# Altium PCB PCB1.PcbDoc (part 1 of 4)
Units mil, origin at the board's own origin, x right, y up, seen from the top; angles counter-clockwise.
Board outline 6796.85 x 4400 mil, 4 copper layers (Top Layer, Layer 1, Layer 2, Bottom Layer), stack 23.756 mil thick; 175 components, 152 nets, 720 pads, 183 vias.
Unrouted connection lines stored in the file: 10.
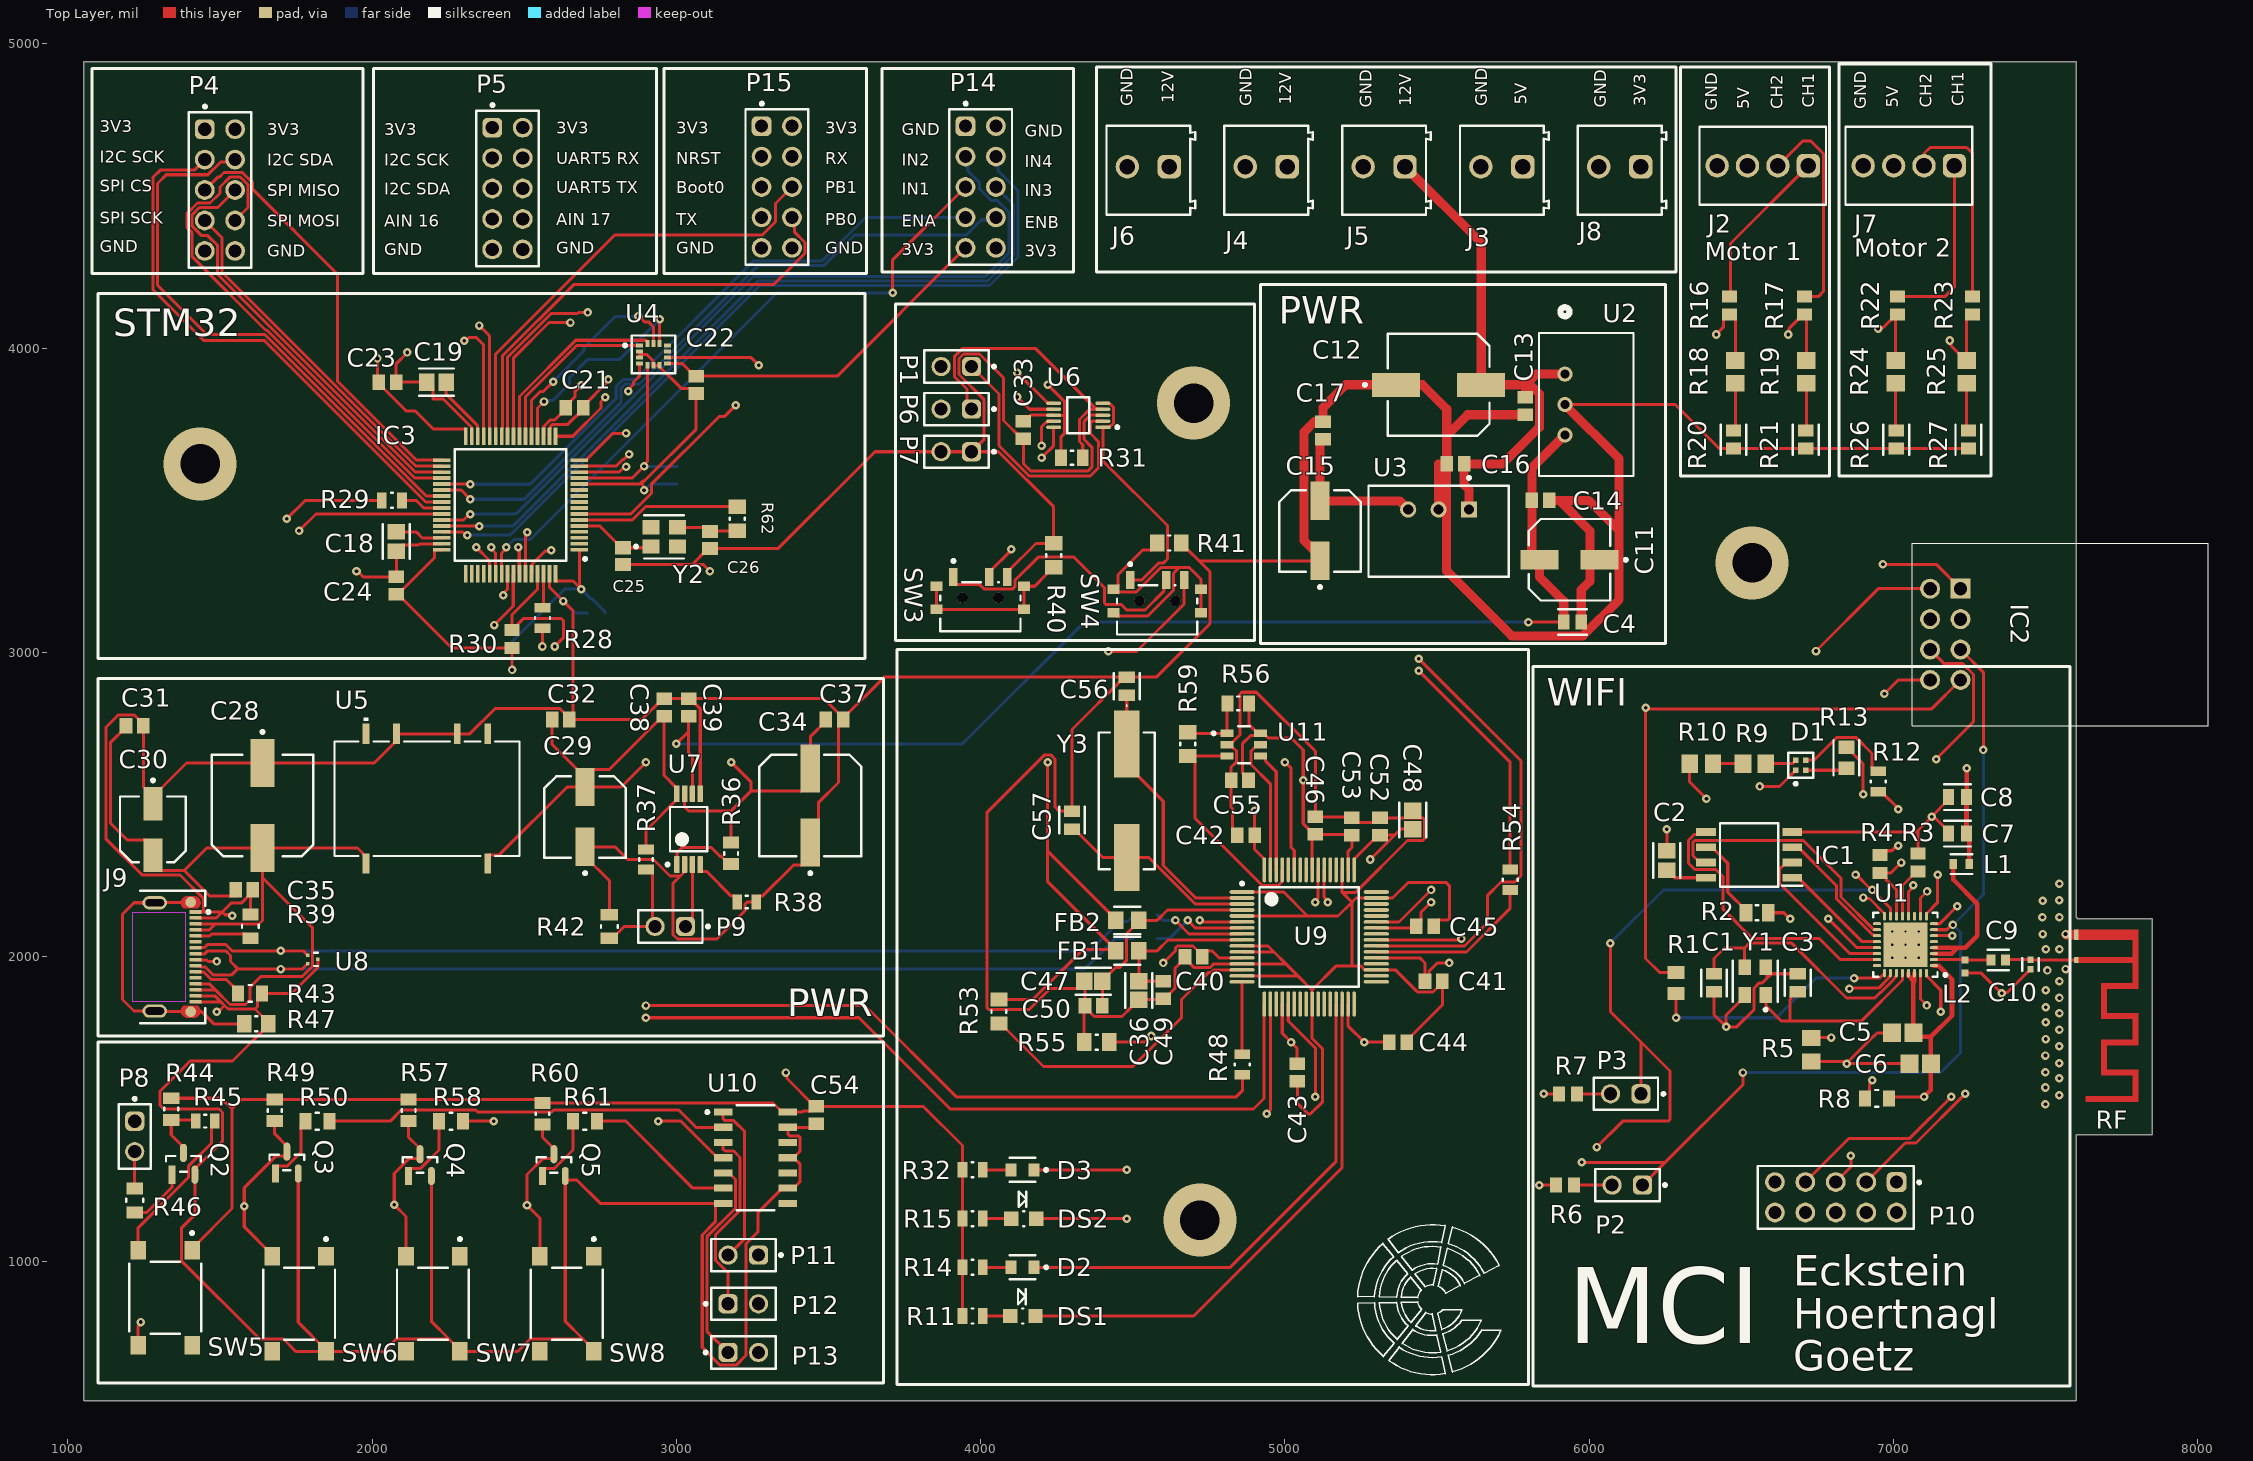
[diagram p0: Top Layer view]
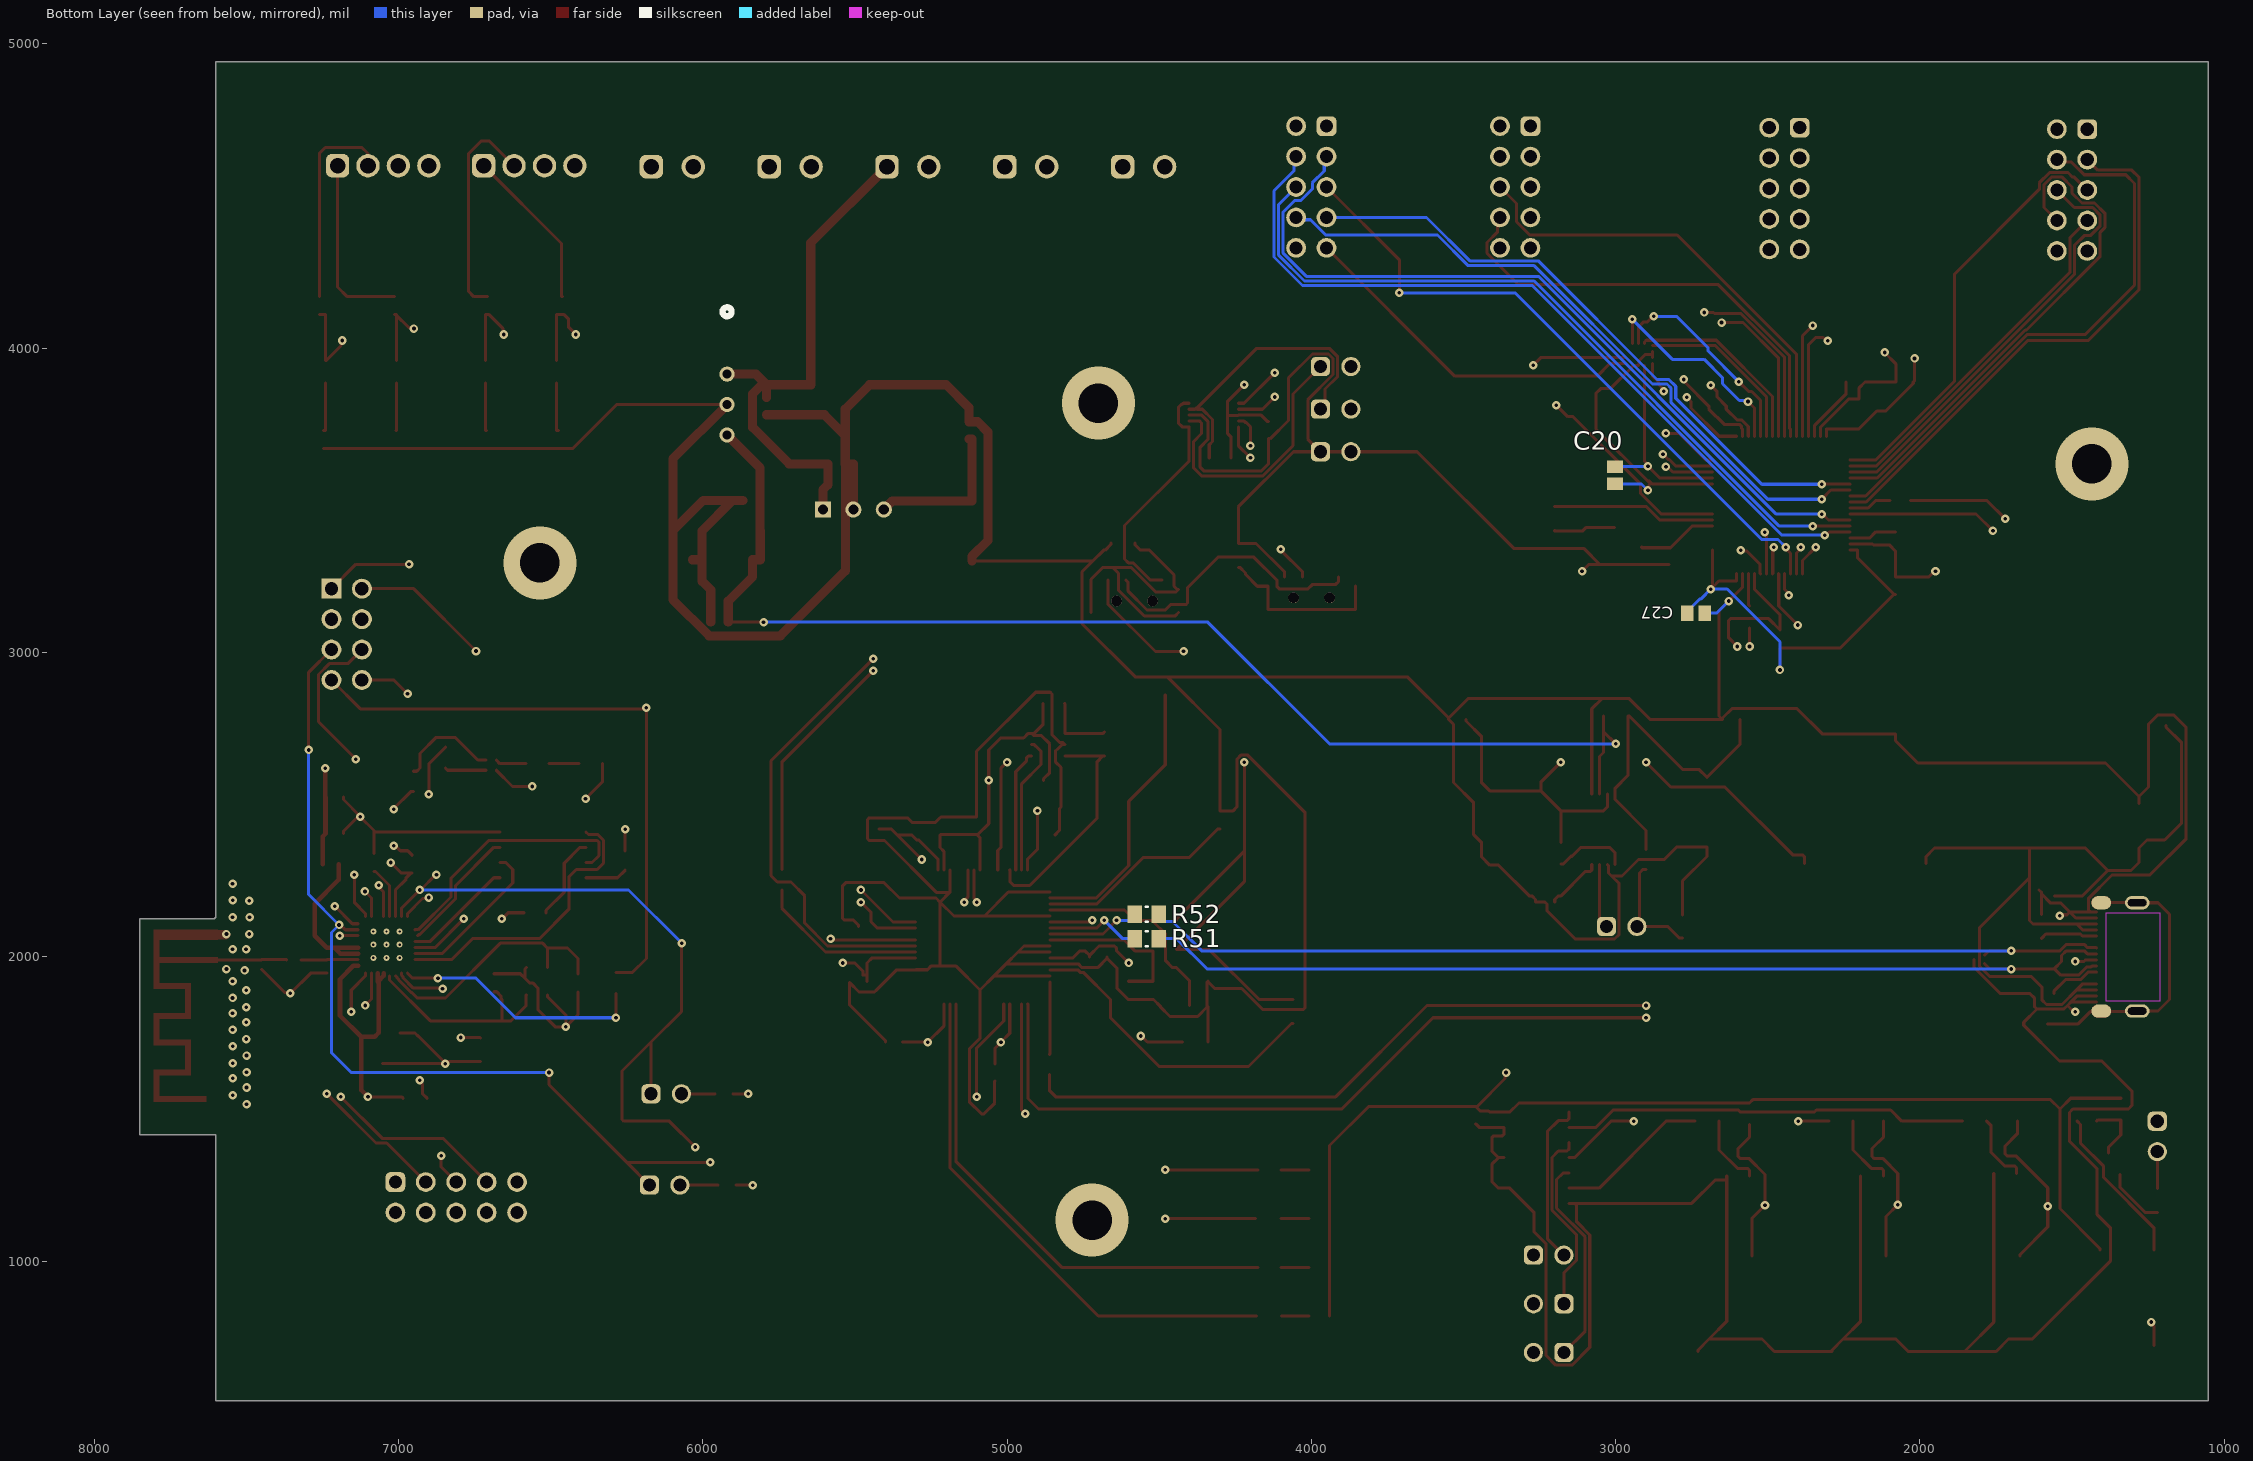
[diagram p1: Bottom Layer view, seen from below]
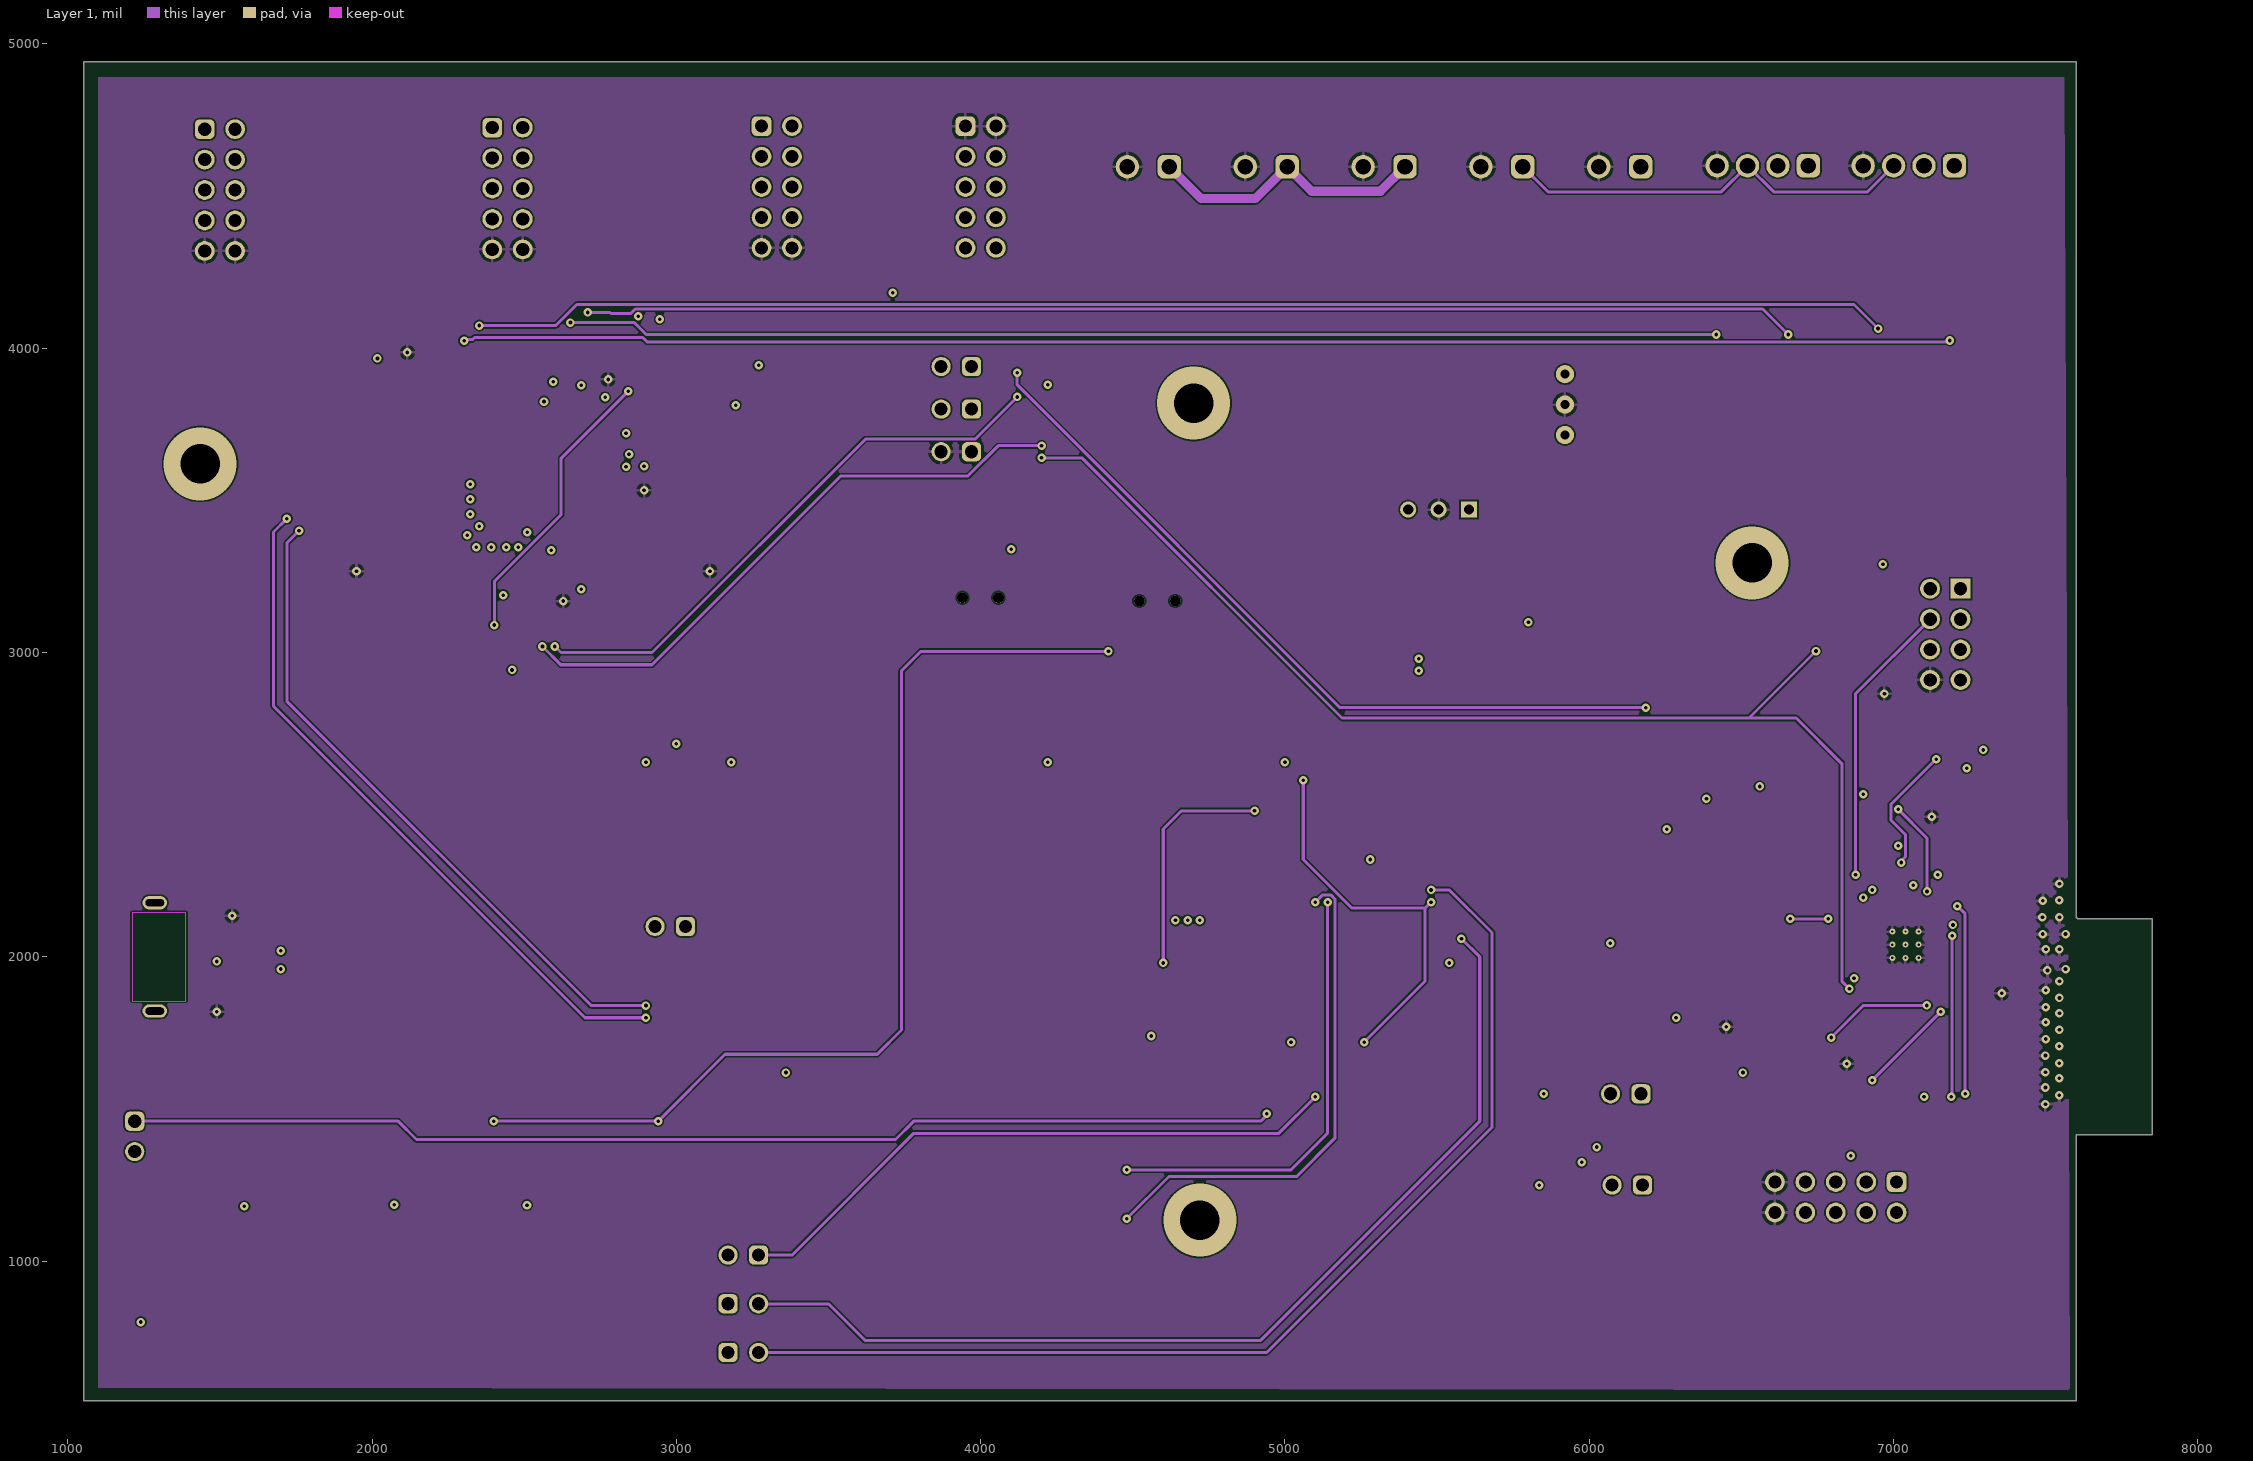
[diagram p2: Layer 1]
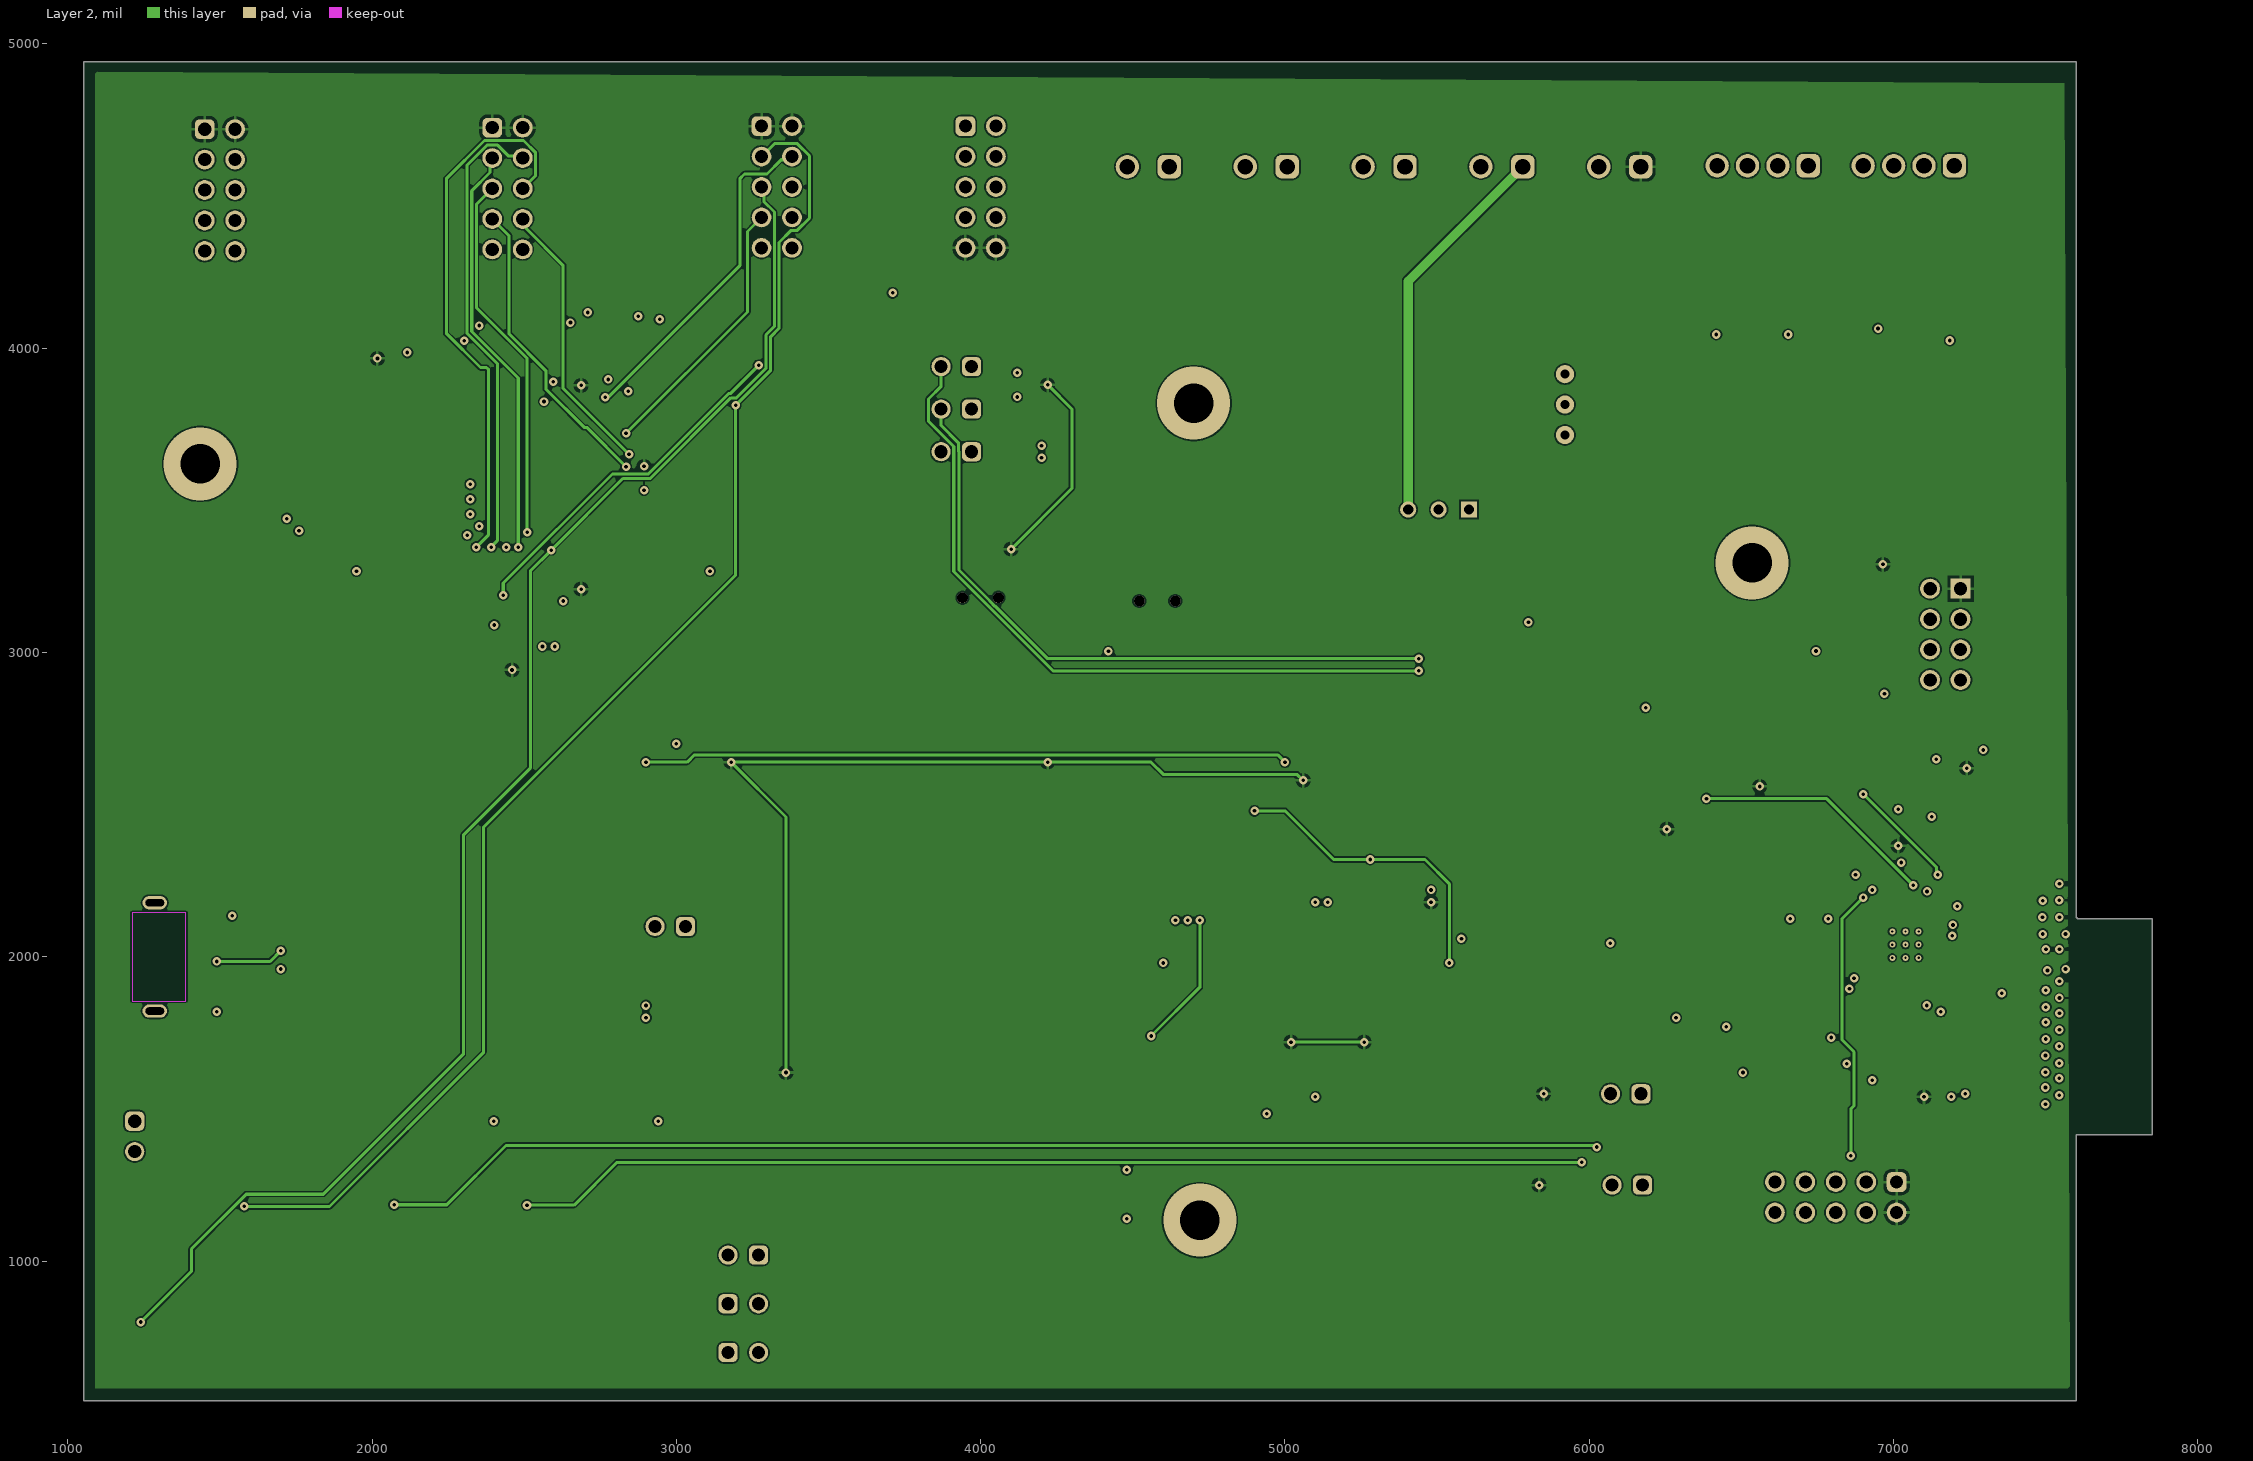
[diagram p3: Layer 2]
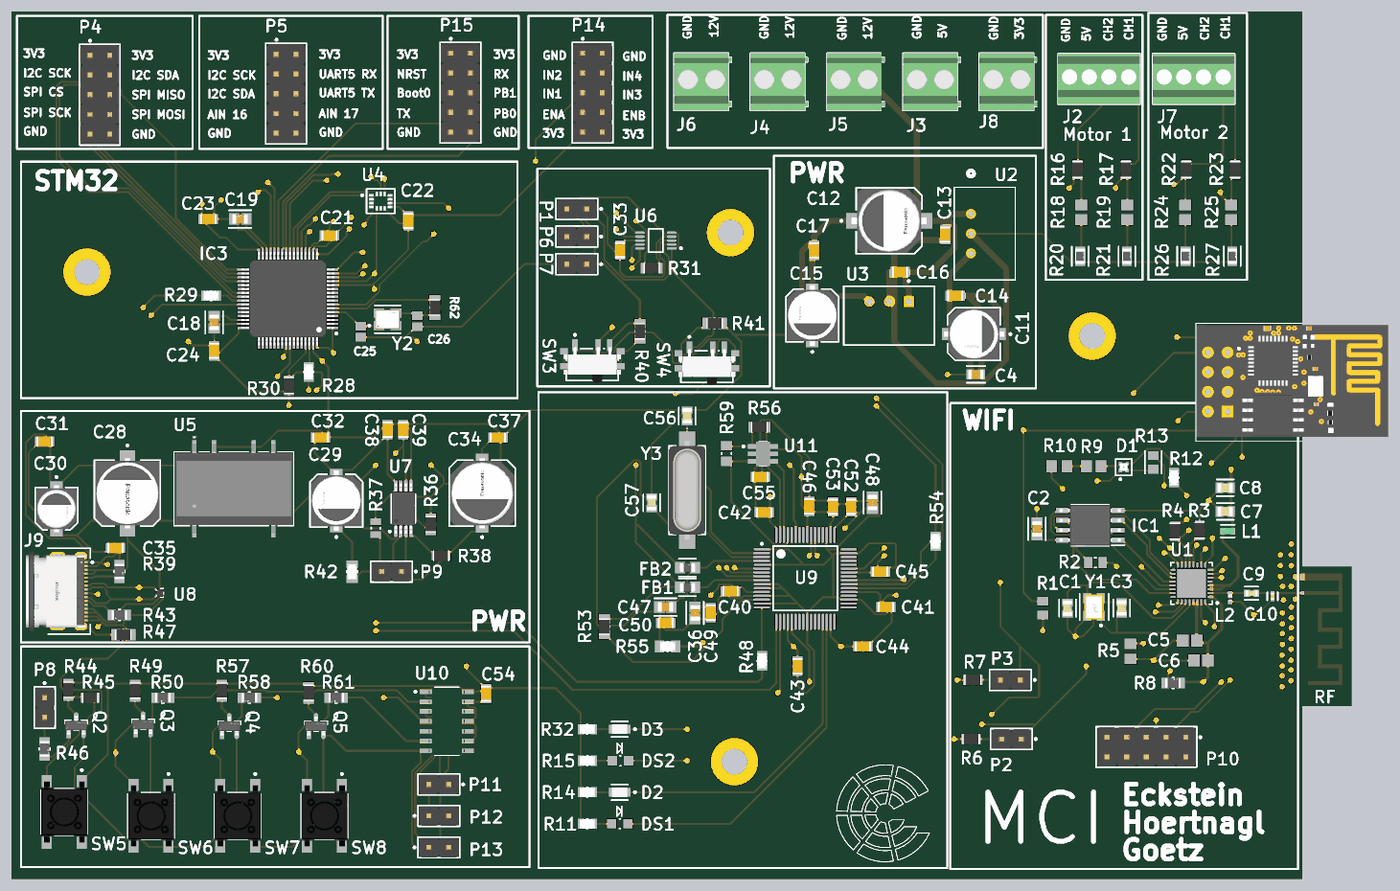
[diagram p6: 3D render of the assembled board from above, using the file's embedded part models]
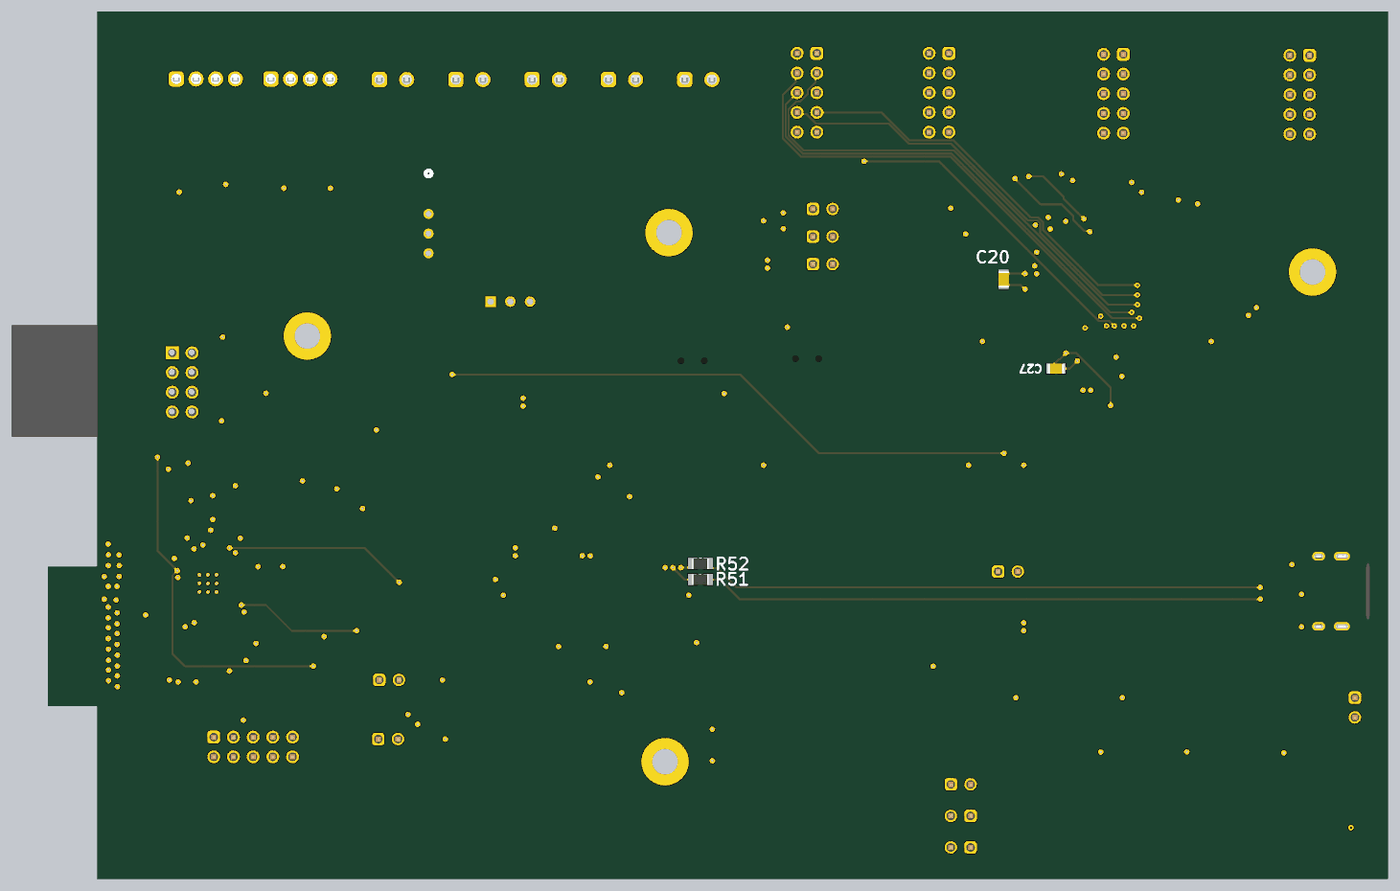
[diagram p7: 3D render of the assembled board from below, using the file's embedded part models]

## Layer stack, top to bottom
Top Solder: solder mask 0.4, Solder Resist, Dk 3.5
Top Layer: signal copper 1.4
Dielectric 2: prepreg 2.8, PP-006, Dk 4.1
Layer 1: signal copper 1.378
Dielectric 1: dielectric 12.6, FR-4, Dk 4.8
Layer 2: signal copper 1.378
Dielectric 3: prepreg 2.8, PP-006, Dk 4.1
Bottom Layer: signal copper 1.4
Bottom Solder: solder mask 0.4, Solder Resist, Dk 3.5

## Board outline
7600,2130 7605,2125 7850,2125 7850,1415 7600,1415 7600,540.94 1053.15,540.94 1053.15,4940.94 7600,4940.94

## Design rules (kind name [scope] priority, off if disabled: settings)
Clearance [All] p1: gap=5 ignorepadtopadclearanceinfootprint=TRUE
HoleSize [All] p1: absolutevalues=TRUE maxlimit=300 minlimit=1 maxpercent=80.000 minpercent=20.000
MinimumSolderMaskSliver [All] p1: minsoldermaskwidth=5
PolygonConnect [All] p1: connectstyle=Relief reliefconductorwidth=10 reliefentries=4 polygonreliefangle="90 Angle" airgapwidth=10
RoutingVias [All] p1: holewidth=12 width=28 viastyle="Through Hole" minholewidth=12 minwidth=28 maxholewidth=12 maxwidth=28
SilkToSilkClearance [All] p1: silktosilkclearance=5
SilkToSolderMaskClearance [IsPad] p1: minsilkscreentomaskgap=5 clearancetoexposedcopper=TRUE
SolderMaskExpansion [All] p1: expansion=4 istentingtop=FALSE
SupplyNets "Schematic Supply Nets_7" [InNet('5VBUS')] p1: voltage=0.000
SupplyNets "Schematic Supply Nets_6" [InNet('+12V')] p2: voltage=0.000
SupplyNets "Schematic Supply Nets_5" [InNet('VCORE')] p3: voltage=0.000
SupplyNets "Schematic Supply Nets_4" [InNet('3V3BUS')] p4: voltage=0.000
SupplyNets "Schematic Supply Nets_3" [InNet('+5V')] p5: voltage=0.000
SupplyNets "Schematic Supply Nets_2" [InNet('+3V3')] p6: voltage=0.000
SupplyNets "Schematic Supply Nets_1" [InNet('3V3AKKU')] p7: voltage=0.000
SupplyNets "Schematic Supply Nets" [InNet('GND')] p8: voltage=0.000
Width [All] p1: maxlimit=30 minlimit=10 preferedwidth=10 minimp=50.000000 maximp=50.000000 favimp=50.000000
26 further rules are at their usual default settings.

## Classes and differential pairs
component class stm32_schematic: C4 C11 C12 C13 C14 C15 C16 C17 C18 C19 C20 C21 C22 C23 C24 C25 C26 C27 IC3 J2 J3 J4 J5 J6 J7 J8 P4 P5 P14 P15 R16 R17 R18 R19 R20 R21 R22 R23 R24 R25 R26 R27 R28 R29 R30 R62 U2 U3 U4 Y2
component class PCB_USB_UART: C28 C29 C30 C31 C32 C33 C34 C35 C36 C37 C38 C39 C40 C41 C42 C43 C44 C45 C46 C47 C48 C49 C50 C51 C52 C53 C54 C55 C56 C57 D2 D3 DS1 DS2 FB1 FB2 P1 P6 P7 P8 P9 P11 P12 P13 Q2 Q3 Q4 Q5 R11 R14 R15 R31 R32 R36 R37 R38 R39 R40 R41 R42 R43 R44 R45 R46 R47 R48 R49 R50 R51 R52 R53 R54 R55 R56 R57 R58 R59 R60 R61 SW3 SW4 SW5 SW6 SW7 SW8 U5 U6 U7 U8 U9 U10 U11 Y3
component class ESP8266_final: *1 C1 C2 C3 C5 C6 C7 C8 C9 C10 D1 IC1 IC2 J1 L1 L2 P2 P3 P10 Q1 R1 R2 R3 R4 R5 R6 R7 R8 R9 R10 R12 R13 RF U1 Y1

## Components (designator, comment, footprint, x,y, rotation, side; value= is the part's Value field where it differs from the comment)
C1 "C0805C100J5GACTU" FP-C0805C-DN-MFG 6410,1914.53 r270 top value="10 pF"
C2 "08051C104KAT2A" FP-0805-L_2_01_0_2-W_1_25-IPC_B 6255,2316.72 r270 top
C3 "C0805C100J5GACTU" FP-C0805C-DN-MFG 6685,1915 r270 top value="10 pF"
C4 "GRM21BR61C106KE15L" FP-GRM21B-0_1-IPC_C 5944.88,3100.39 r0 top
C5 "C0805C105K5RACTU" CAPC2013X140X50ML20T25 7030,1750 r0 top
C6 "C0805C105K5RACTU" CAPC2013X140X50ML20T25 7087,1649 r0 top
C7 "C0805C106K8PACTU" FP-C0805C-DG-MFG 7210,2405 r180 top value=10uF
C8 "C0805C104J8RACTU" FP-C0805C-DN-MFG 7210,2525 r180 top value="0.10 μF"
C9 "C0603C829C5GACTU" FP-C0603C-CF-MFG 7343.62,1990 r180 top value="8.2 pF"
C10 "CBR04C249B5GAC" FP-CBR04C-MFG 7450,1975 r90 top value="2.4 pF"
C11 "EEEFT1H470AP" FP-FTD-MFG 5935,3305 r180 top
C12 "EEEFT1H221AP" FP-FTF-MFG 5504.76,3880 r0 top
C13 "Capacitor 100 nF +/-10% 50 V 0805" CAPC2013X95X50LL10T25 5790,3810 r90 top value=100nF
C14 "Capacitor 100 nF +/-10% 50 V 0805" CAPC2013X95X50LL10T25 5840,3500 r180 top value=100nF
C15 "EEEFT1H470AP" FP-FTD-MFG 5115,3400 r90 top
C16 "Capacitor 100 nF +/-10% 50 V 0805" CAPC2013X95X50LL10T25 5560,3620 r0 top value=100nF
C17 "Capacitor 100 nF +/-10% 50 V 0805" CAPC2013X95X50LL10T25 5125,3730 r270 top value=100nF
C18 "0805ZD225KAT2A" FP-0805-L_2_01_0_2-W_1_25-IPC_B 2080,3365 r270 top
C19 "0805ZD225KAT2A" FP-0805-L_2_01_0_2-W_1_25-IPC_B 2211.89,3889.06 r180 top
C20 "Capacitor 100 nF +/-10% 50 V 0805" CAPC2013X95X50LL10T25 3001.97,3582.68 r90 bottom value=100nF
C21 "Capacitor 100 nF +/-10% 50 V 0805" CAPC2013X95X50LL10T25 2665,3805 r180 top value=100nF
C22 "Capacitor 100 nF +/-10% 50 V 0805" CAPC2013X95X50LL10T25 3065,3880 r90 top value=100nF
C23 "Capacitor 100 nF +/-10% 50 V 0805" CAPC2013X95X50LL10T25 2050.43,3889.06 r180 top value=100nF
C24 "Capacitor 100 nF +/-10% 50 V 0805" CAPC2013X95X50LL10T25 2080,3220 r270 top value=100nF
C25 "08055A150JAT2A" CAPC2013X140X50LL20T25 2824.8,3316.93 r90 top
C26 "08055A150JAT2A" CAPC2013X140X50LL20T25 3110,3370 r90 top
C27 "Capacitor 100 nF +/-10% 50 V 0805" CAPC2013X95X50LL10T25 2736.22,3129.92 r0 bottom value=100nF
C28 "EEEFK1H101P" FP-FKF-MFG 1640,2497.4 r270 top
C29 "EEEFT1H470AP" FP-FTD-MFG 2700,2460 r90 top
C30 "EEE-FK1H100UR" FP-FKC-MFG 1280,2418.66 r270 top
C31 "Capacitor 100 nF +/-10% 50 V 0805" CAPC2013X95X50LL10T25 1220,2760 r180 top value=100nF
C32 "Capacitor 100 nF +/-10% 50 V 0805" CAPC2013X95X50LL10T25 2620,2780 r180 top value=100nF
C33 "Capacitor 100 nF +/-10% 50 V 0805" CAPC2013X95X50LL10T25 4140,3731.46 r90 top value=100nF
C34 "EEE-FC1H220P" FP-FCE-MFG 3440,2497.4 r90 top
C35 "Capacitor 100 nF +/-10% 50 V 0805" CAPC2013X95X50LL10T25 1580,2220 r180 top value=100nF
C36 "C2012X5R1H475K125AB" FP-C2012-125-0_2-IPC_B 4520,1889.92 r270 top
C37 "Capacitor 100 nF +/-10% 50 V 0805" CAPC2013X95X50LL10T25 3520,2780 r180 top value=100nF
C38 "Capacitor 100 nF +/-10% 50 V 0805" CAPC2013X95X50LL10T25 2960,2820 r270 top value=100nF
C39 "Capacitor 100 nF +/-10% 50 V 0805" CAPC2013X95X50LL10T25 3040,2820 r270 top value=100nF
C40 "Capacitor 100 nF +/-10% 50 V 0805" CAPC2013X95X50LL10T25 4700,2000 r0 top value=100nF
C41 "Capacitor 100 nF +/-10% 50 V 0805" CAPC2013X95X50LL10T25 5488.54,1920 r180 top value=100nF
C42 "Capacitor 100 nF +/-10% 50 V 0805" CAPC2013X95X50LL10T25 4871.46,2400 r0 top value=100nF
C43 "Capacitor 100 nF +/-10% 50 V 0805" CAPC2013X95X50LL10T25 5040,1620 r90 top value=100nF
C44 "Capacitor 100 nF +/-10% 50 V 0805" CAPC2013X95X50LL10T25 5371.46,1720 r180 top value=100nF
C45 "Capacitor 100 nF +/-10% 50 V 0805" CAPC2013X95X50LL10T25 5460,2100 r180 top value=100nF
C46 "Capacitor 100 nF +/-10% 50 V 0805" CAPC2013X95X50LL10T25 5100,2431.46 r270 top value=100nF
C47 "C2012X5R1H475K125AB" FP-C2012-125-0_2-IPC_B 4369.92,1920 r180 top
C48 "C2012X5R1H475K125AB" FP-C2012-125-0_2-IPC_B 5420,2449.92 r90 top
C49 "Capacitor 100 nF +/-10% 50 V 0805" CAPC2013X95X50LL10T25 4600,1891.46 r90 top value=100nF
C50 "Capacitor 100 nF +/-10% 50 V 0805" CAPC2013X95X50LL10T25 4371.46,1840 r0 top value=100nF
C52 "Capacitor 100 nF +/-10% 50 V 0805" CAPC2013X95X50LL10T25 5312.36,2428.54 r270 top value=100nF
C53 "Capacitor 100 nF +/-10% 50 V 0805" CAPC2013X95X50LL10T25 5220,2428.54 r270 top value=100nF
C54 "Capacitor 100 nF +/-10% 50 V 0805" CAPC2013X95X50LL10T25 3460,1480 r90 top value=100nF
C55 "Capacitor 100 nF +/-10% 50 V 0805" CAPC2013X95X50LL10T25 4851.46,2580 r0 top value=100nF
C56 "C0805C270J5GACTU" FP-C0805C-DN-MFG 4480,2889.53 r90 top value="27 pF"
C57 "C0805C270J5GACTU" FP-C0805C-DN-MFG 4300,2449.53 r90 top value="27 pF"
D1 "SML-LX0404SIUPGUSB" FP-SML-LX0404SIUPGUSB-MFG 6695,2630 r90 top
D2 "SML-LXT0805IW-TR" FP-SML-LXT0805IW-TR-MFG 4137.4,980 r180 top
D3 "SML-LXT0805IW-TR" FP-SML-LXT0805IW-TR-MFG 4137.4,1300 r180 top
DS1 "SML-LXT0805GW-TR" LUMX-SML-LXT0805_V 4138.66,820 r0 top
DS2 "SML-LXT0805GW-TR" LUMX-SML-LXT0805_V 4141.34,1140 r0 top
FB1 "HZ0805E601R-10" FP-HZ0805-MFG 4481.71,2020 r0 top
FB2 "HZ0805E601R-10" FP-HZ0805-MFG 4481.71,2120 r0 top
IC1 "W25Q128JVSQ" SOIC127P790X216-8N 6525,2335 r180 top
IC2 "ESP-01" ESP01 7220,3210 r270 top
IC3 "STM32H7A3RIT6" QFP50P1200X1200X160-64N 2455,3485 r180 top
J2 "691210910004" 691210910004 6570,4600 r180 top
J3 "691214110002" 691214110002 5712.78,4585 r180 top
J4 "691214110002" 691214110002 4938.33,4585 r180 top
J5 "691214110002" 691214110002 5325.55,4585 r180 top
J6 "691214110002" 691214110002 4551.1,4585 r180 top
J7 "691210910004" 691210910004 7050,4600 r180 top
J8 "691214110002" 691214110002 6100,4585 r180 top
J9 "213083-0005" FP-2130830005-MFG 1280,2000 r270 top
L1 "LQW18AN4N3C00D" FP-LQW18AN_00-MFG 7222.8,2305 r180 top
L2 "7447840015G" WE-MK_0402_L1W0.5H0.5 7235,1968.35 r90 top
P1 "61300211121" 61300211121 3920,3940 r180 top
P2 "61300211121" 61300211121 6125,1249.98 r180 top
P3 "61300211121" 61300211121 6120,1550 r180 top
P4 "61301021121" 61301021121 1500,4520 r270 top
P5 "61301021121" 61301021121 2445,4525 r270 top
P6 "61300211121" 61300211121 3920,3800 r180 top
P7 "61300211121" 61300211121 3920,3660 r180 top
P8 "61300211121" 61300211121 1220,1410 r270 top
P9 "61300211121" 61300211121 2980,2100 r180 top
P10 "61301021121" 61301021121 6810,1210 r180 top
P11 "61300211121" 61300211121 3220,1020 r180 top
P12 "61300211121" 61300211121 3220,860 r0 top
P13 "61300211121" 61300211121 3220,700 r0 top
P14 "61301021121" 61301021121 4000,4530 r270 top
P15 "61301021121" 61301021121 3330,4530 r270 top
Q2 "BSS138" FP-318-08-IPC_B 1380,1320 r90 top
Q3 "BSS138" FP-318-08-IPC_B 1720,1324.17 r90 top
Q4 "BSS138" FP-318-08-IPC_B 2157.4,1315.83 r90 top
Q5 "BSS138" FP-318-08-IPC_B 2597.4,1315.83 r90 top
R1 "TNPW0805499RBEEN" RESC2013X55X40NL15T20 6285,1914.45 r270 top
R2 "CRCW0805200RFKEA" RESC2013X50X30NL20T20 6551.42,2145 r0 top
R3 "ERA-6AEB103V" RESC2013X60X40LL20T25_A 7080,2310 r270 top
R4 "ERA-6AEB103V" RESC2013X60X40LL20T25_A 6955,2304.53 r90 top
R5 "ERJ6ENF1202V" RESC2013X70X40ML20T20 6730,1695 r90 top
R6 "ERA-6AEB103V" RESC2013X60X40LL20T25_A 5920.47,1250 r180 top
R7 "ERA-6AEB103V" RESC2013X60X40LL20T25_A 5930,1550 r180 top
R8 "RN73C2A12KBTG" FP-RN732A-MFG 6945,1535 r0 top value=12KΩ
R9 "ERA6AEB101V" RESC2013X60X40ML20T25 6542.6,2635 r180 top
R10 "ERJ-6ENF24R9V" RESC2013X70X40ML20T20 6368.39,2635 r180 top
R11 "CRCW080568R0FKEA" FP-CRCW0805-e3-IPC_C 3973.5,820 r180 top
R12 "CRCW080522R0FKEA" FP-CRCW0805-e3-IPC_C 6950,2576.5 r270 top
R13 "ERJ-6ENF4990V" FP-ERJ6EN-IPC_B 6845,2654.47 r90 top
R14 "CRCW080568R0FKEA" FP-CRCW0805-e3-IPC_C 3973.5,980 r180 top
R15 "CRCW080568R0FKEA" FP-CRCW0805-e3-IPC_C 3973.5,1140 r180 top
R16 "ERA-6AEB103V" RESC2013X60X40LL20T25_A 6460.31,4140 r90 top
R17 "ERA-6AEB103V" RESC2013X60X40LL20T25_A 6706.77,4140 r90 top
R18 "ERA6AEB472V" RESC2013X60X40ML20T25 6480,3922.6 r90 top
R19 "ERA6AEB472V" RESC2013X60X40ML20T25 6713.33,3922.6 r90 top
R20 "ERA6AEB102V" FP-ERA6A-IPC_C 6474.09,3700 r90 top
R21 "ERA6AEB102V" FP-ERA6A-IPC_C 6711.36,3700 r90 top
R22 "ERA-6AEB103V" RESC2013X60X40LL20T25_A 7013.23,4140 r90 top
R23 "ERA-6AEB103V" RESC2013X60X40LL20T25_A 7259.68,4140 r90 top
R24 "ERA6AEB472V" RESC2013X60X40ML20T25 7006.67,3922.6 r90 top
R25 "ERA6AEB472V" RESC2013X60X40ML20T25 7240,3922.6 r90 top
R26 "ERA6AEB102V" FP-ERA6A-IPC_C 7008.64,3700 r90 top
R27 "ERA6AEB102V" FP-ERA6A-IPC_C 7245.91,3700 r90 top
R28 "CRCW080568R0FKEA" FP-CRCW0805-e3-IPC_C 2560,3113.5 r270 top
R29 "CRCW080568R0FKEA" FP-CRCW0805-e3-IPC_C 2065,3500 r180 top
R30 "ERA-6AEB103V" RESC2013X60X40LL20T25_A 2460,3045 r270 top
R31 "RC0805FR-0710KL" RESC2013X60X35NL10T20 4300,3640 r180 top
R32 "CRCW080568R0FKEA" FP-CRCW0805-e3-IPC_C 3973.5,1300 r180 top
R36 "RC0805FR-0710KL" RESC2013X60X35NL10T20 3180,2340 r270 top
R37 "CRCW08054K30FKEA" RESC2013X50X30LL20T20 2900,2320 r90 top
R38 "RC0805FR-07470RL" RESC2013X60X35LL10T20 3231.5,2180 r180 top
R39 "RN73C2A5K11BTDF" FP-RN732A-MFG 1600,2100.63 r270 top value=5.11KΩ
R40 "RC0805JR-070RL" RESC2013X60X35ML10T20 4240,3319.37 r270 top
R41 "RC0805JR-070RL" RESC2013X60X35ML10T20 4619.37,3360 r180 top
R42 "CRCW08051K50FKEA" FP-CRCW0805-e3-MFG 2780,2100 r270 top
R43 "RN73C2A5K11BTDF" FP-RN732A-MFG 1599.37,1880 r180 top value=5.11KΩ
R44 "RC0805FR-0710KL" RESC2013X60X35NL10T20 1340,1500 r90 top
R45 "RC0805FR-07470RL" RESC2013X60X35LL10T20 1451.5,1460 r0 top
R46 "RN73C2A100RBTDF" FP-RN732A-MFG 1220,1200 r270 top value=100Ω
R47 "RC0805JR-070RL" RESC2013X60X35ML10T20 1619.37,1780 r0 top
R48 "CRCW080568R0FKEA" FP-CRCW0805-e3-IPC_C 4860,1646.5 r270 top
R49 "RC0805FR-0710KL" RESC2013X60X35NL10T20 1680,1495.43 r90 top
R50 "RN73C2A100RBTDF" FP-RN732A-MFG 1820,1460 r180 top value=100Ω
R51 "RC0805FR-0710RL" RESC2013X60X35ML10T20 4540.63,2060 r0 bottom
R52 "RC0805FR-0710RL" RESC2013X60X35ML10T20 4540.63,2140 r0 bottom
R53 "RC0805FR-071KL" RESC2013X60X35ML10T20 4060,1820.63 r270 top
R54 "CRCW080568R0FKEA" FP-CRCW0805-e3-IPC_C 5740,2253.5 r90 top
R55 "CRCW080512K0FKEA" FP-CRCW0805-e3-IPC_A 4381.37,1720 r0 top
R56 "RC0805FR-0710KL" RESC2013X60X35NL10T20 4846.68,2833.06 r0 top
R57 "RC0805FR-0710KL" RESC2013X60X35NL10T20 2120,1495.43 r90 top
R58 "RN73C2A100RBTDF" FP-RN732A-MFG 2259.37,1460 r180 top value=100Ω
R59 "RC0805JR-072KL" RESC2013X60X35ML10T20 4680,2699.37 r270 top
R60 "RC0805FR-0710KL" RESC2013X60X35NL10T20 2560,1484.57 r90 top
R61 "RN73C2A100RBTDF" FP-RN732A-MFG 2699.37,1460 r180 top value=100Ω
R62 "Resistor 0R +/- 5% 0805 125 mW" RESC2013X60X35ML10T20 3200,3440 r90 top value=0
RF "RF_ESP8266" PCBComponent_1 7605.48,2072.61 r270 top
SW3 "PCM12SMTR" FP-PCM12SMTR-MFG 3999.06,3150.47 r0 top
SW4 "PCM12SMTR" FP-PCM12SMTR-MFG 4580,3140 r0 top
SW5 "PTS645SM43SMTR92LFS" FP-PTS645SM43SMTR92LFS-MFG 1320,880 r270 top
SW6 "PTS645SM43SMTR92LFS" FP-PTS645SM43SMTR92LFS-MFG 1760,860 r270 top
SW7 "PTS645SM43SMTR92LFS" FP-PTS645SM43SMTR92LFS-MFG 2200,860 r270 top
SW8 "PTS645SM43SMTR92LFS" FP-PTS645SM43SMTR92LFS-MFG 2640,860 r270 top
U1 "ESP8266EX" ESFS-QFN-32_L 7039,2040 r180 top
U2 "TSR 1-2433" TSR1-SINGLE_TRP 5920,3915 r270 top
U3 "TSR 1-2450" TRACO-SIP-3_V 5505,3470 r180 top
U4 "LSM6DSOXTR" FP-LGA-14L-DM00249496-MFG 2925,3980 r0 top
U5 "TSRN 1-2433SM" TSR(N 2180,2520 r90 top
U6 "TS5A23157DGSR" FP-DGS0010A-IPC_C 4320.74,3780 r180 top
U7 "TPS2113APW" PW0008A_N 3040,2419.65 r90 top
U8 "TPD2EUSB30DRTR" DRT0003A 1804.84,1991.7 r0 top
U9 "FT2232HL-Reel" LQFP-64_M 5079.61,2065.59 r0 top
U10 "SN74LVC14AD" FP-D0014A-MFG 3260,1340 r0 top
U11 "93LC56BT-I/OT" FP-C04-028-MFG 4864.88,2697.4 r0 top
Y1 "ABM8-26.000MHZ-10-1-U-T" FP-ABM8-MFG 6545,1920 r90 top
Y2 "ABM8AIG-24.000MHZ-12-2Z-T3" FP-ABM8AIG-MFG 2960,3380 r0 top
Y3 "ABLS2-12.000MHZ-B4Y-T" ABLS 4480,2512.99 r270 top

## Footprints (in the part's own frame and the unit in brackets; to place one, negate y for a bottom-side part, rotate by r counter-clockwise, add the part's x,y. Pads: shape width x height; smd on the part's side, far side on the other; paste and mask are expansions set on the pad)
61300211121 [mm] "Pin Header, pitch 2.54 mm, THT, Vertical, single row, 2p"
  rrect50% 1.6x1.6 hole 1.1: 1(-1.27,0)
  round 1.6 hole 1.1: 2(1.27,0)
  silkscreen extent -3.26,-1.34 2.69,1.34, body extent -2.54,-1.27 2.54,1.27, height 8.57
61301021121 [mm] "Pin Header, pitch 2.54 mm, THT, Vertical, dual row, 10p"
  rrect50% 1.65x1.65 hole 1.1: 1(-5.08,-1.27)
  round 1.65 hole 1.1: 2(-5.08,1.27) 3(-2.54,-1.27) 4(-2.54,1.27) 5(0,-1.27) 6(0,1.27) 7(2.54,-1.27) 8(2.54,1.27) 9(5.08,-1.27) 10(5.08,1.27)
  silkscreen extent -7.08,-2.61 6.5,2.61, body extent -6.35,-2.54 6.35,2.54, height 8.59
691210910004 [mm] "2,54mm - modular - green - Horizontal wire entry - Cage clamp - 0,8mm2 wires - 04p"
  rrect50% 1.95x1.95 hole 1.3: 1(-3.81,0)
  round 1.95 hole 1.3: 2(-1.27,0) 3(1.27,0) 4(3.81,0)
  silkscreen extent -5.28,-3.25 5.28,3.25, body extent -5.28,-3.25 5.28,3.25, height 8.55
691214110002 [mm] "3.50 mm Horizontal Entry Modular, 2p"
  rrect50% 1.95x1.95 hole 1.3: 1(-1.75,-0.3)
  round 1.95 hole 1.3: 2(1.75,-0.3)
  silkscreen extent -3.9,-3.7 3.5,3.7, body extent -3.95,-3.7 3.5,3.7, height 8.55
ABLS [mm]
  rect 5.6x2.1 smd: 1(-4.75,0) 2(4.75,0)
  silkscreen extent -8,-2.35 5.7,2.35, body extent -6.35,-2.35 6.35,2.35, height 4.2
CAPC2013X95X50LL10T25 [mm] "Chip Capacitor, 2-Leads, Body 2.10x1.35mm, IPC High Density"
  rect 1.05x1.3 smd: 1(-0.725,0) 2(0.725,0)
  body extent -1.05,-0.67 1.05,0.67, height 0.95
CAPC2013X140X50LL20T25 [mm] "Chip Capacitor, 2-Leads, Body 2.00x1.25mm, IPC High Density"
  rect 1.1x1.35 smd: 1(-0.7,0) 2(0.7,0)
  body extent -1.1,-0.72 1.1,0.72, height 1.4
CAPC2013X140X50ML20T25 [mm] "Chip Capacitor, 2-Leads, Body 2.00x1.25mm, IPC Low Density"
  rect 1.5x1.55 smd: 1(-0.9,0) 2(0.9,0)
  body extent -1.1,-0.72 1.1,0.72, height 1.4
DRT0003A [mm] "SOTFL, 3-Leads, Body 1x1mm (inc leads), Pitch 0.35mm"
  rrect33% 0.3x0.3 smd: 1(-0.425,0.35) 2(-0.425,-0.35) 3(0.425,0)
  silkscreen extent 0.13,-0.55 0.42,0.55, body extent -0.5,-0.5 0.5,0.5, height 0.5
ESFS-QFN-32_L [mm] "QFN, 32-Leads, Body 5.05x5.05mm, Pitch 0.50mm, Thermal Pad 3.70x3.70mm, IPC High Density"
  oval 0.7x0.25 smd: 1(-2.375,1.75) 2(-2.375,1.25) 3(-2.375,0.75) 4(-2.375,0.25) 5(-2.375,-0.25) 6(-2.375,-0.75) 7(-2.375,-1.25) 8(-2.375,-1.75) 17(2.375,-1.75) 18(2.375,-1.25) 19(2.375,-0.75) 20(2.375,-0.25) 21(2.375,0.25) 22(2.375,0.75) 23(2.375,1.25) 24(2.375,1.75)
  oval 0.25x0.7 smd: 9(-1.75,-2.375) 10(-1.25,-2.375) 11(-0.75,-2.375) 12(-0.25,-2.375) 13(0.25,-2.375) 14(0.75,-2.375) 15(1.25,-2.375) 16(1.75,-2.375) 25(1.75,2.375) 26(1.25,2.375) 27(0.75,2.375) 28(0.25,2.375) 29(-0.25,2.375) 30(-0.75,2.375) 31(-1.25,2.375) 32(-1.75,2.375)
  rect 3.7x3.7 smd: 33(0,0)
  silkscreen extent -3.45,-2.67 2.68,2.68, body extent -2.52,-2.52 2.53,2.53, height 0.9
ESP01 [mm]
  rect 1.665x1.665 hole 1.11: 1(0,0)
  round 1.665 hole 1.11: 2(2.54,0) 3(5.08,0) 4(7.62,0) 5(0,-2.54) 6(2.54,-2.54) 7(5.08,-2.54) 8(7.62,-2.54)
  silkscreen extent -3.81,-4.04 11.43,20.66, body extent -3.56,-3.98 10.84,20.72, height 2.75
FP-318-08-IPC_B [mm]
  rect 1.524x0.578 smd paste+0 mask+0: 1(-0.91,0.95)
  rrect100% 1.524x0.578 smd paste+0 mask+0: 2(-0.91,-0.95) 3(0.91,0)
  silkscreen extent -0.65,-1.45 0.65,1.45, body extent -1.92,-1.7 1.92,1.7, height 0.25
FP-0805-L_2_01_0_2-W_1_25-IPC_B [mil]
  rect 51.36x57.33 smd paste+0 mask+0: 1(-31.72,0) 2(31.72,0)
  silkscreen extent -57,-44 57,44, body extent -67,-39 67,39, height 10
FP-2130830005-MFG [mm]
  round 0.9 smd paste-1000 mask+0: 1(-4.57,3.15) 2(4.57,3.15)
  rrect100% 1.1x1.65 smd far side paste-1000 mask+0: 1(-4.52,3.15) 2(4.52,3.15)
  rrect100% 1.1x2.05 hole 1.55 slot 0.6 at 0 deg paste-2539.97 mask+0: 3(-4.52,0.15) 4(4.52,0.15)
  rect 0.3x1 smd paste+0 mask+0: A1(-3.75,3.55) A4(-2.75,3.55) A5(-1.75,3.55) A6(-0.75,3.55) A7(0.75,3.55) A8(1.75,3.55) A9(2.75,3.55) A12(3.75,3.55) B1(3.25,3.55) B4(2.25,3.55) B5(1.25,3.55) B6(0.25,3.55) B7(-0.25,3.55) B8(-1.25,3.55) B9(-2.25,3.55) B12(-3.25,3.55)
  Top Layer region: 5.07,3.425 5.001,3.691 4.812,3.891 4.549,3.974 4.28,3.919 4.07,3.741 4.07,3.741 4.07,2.559 4.28,2.381 4.549,2.326 4.812,2.409 5.001,2.609 5.07,2.875 5.07,2.875
  Top Layer region: -5.07,3.425 -5.001,3.691 -4.812,3.891 -4.549,3.974 -4.28,3.919 -4.07,3.741 -4.07,3.741 -4.07,2.559 -4.28,2.381 -4.549,2.326 -4.812,2.409 -5.001,2.609 -5.07,2.875 -5.07,2.875
  Keep-Out Layer region: -3.7,-1.745 3.7,-1.745 3.7,2.755 -3.7,2.755
  silkscreen extent -5.53,-1.07 5.53,4.75, body extent -5.33,-4.18 5.33,4.18, height 0.25
FP-ABM8-MFG [mm]
  rect 1.3x1.05 smd paste+0 mask+0: 1(-1.15,-0.875) 2(1.15,-0.875) 3(1.15,0.875) 4(-1.15,0.875)
  silkscreen extent -2.5,-1.87 1.7,1.87, body extent -1.9,-1.5 1.9,1.5, height 0.25
FP-ABM8AIG-MFG [mm]
  rect 1.4x1.2 smd paste+0 mask+0: 1(-1.1,-0.8) 2(1.1,-0.8) 3(1.1,0.8) 4(-1.1,0.8)
  silkscreen extent -2.47,-1.8 1.65,1.8, body extent -1.9,-1.5 1.9,1.5, height 0.25
FP-C04-028-MFG [mm]
  rect 1.1x0.6 smd paste+0 mask+0: 1(-1.4,0.95) 2(-1.4,0) 3(-1.4,-0.95) 4(1.4,-0.95) 5(1.4,0) 6(1.4,0.95)
  silkscreen extent -2.65,-1.55 0.47,1.55, body extent -2.05,-1.88 2.05,1.88, height 0.25
FP-C0603C-CF-MFG [mm]
  rect 0.75x0.9 smd paste+0 mask+0: 1(-0.6,0) 2(0.6,0)
  silkscreen extent -0.87,-0.85 0.88,0.85, body extent -1.2,-0.6 1.2,0.6, height 0.25
FP-C0805C-DG-MFG [mm]
  rect 0.95x1.35 smd paste+0 mask+0: 1(-0.75,0) 2(0.75,0)
  silkscreen extent -1.11,-1.08 1.1,1.07, body extent -1.4,-0.85 1.4,0.85, height 0.25
FP-C0805C-DN-MFG [mm]
  rect 0.95x1.35 smd paste+0 mask+0: 1(-0.75,0) 2(0.75,0)
  silkscreen extent -1.1,-1.07 1.1,1.07, body extent -1.4,-0.85 1.4,0.85, height 0.25
FP-C2012-125-0_2-IPC_B [mil]
  rect 54.25x57.33 smd paste+0 mask+0: 1(-30.08,0) 2(30.08,0)
  silkscreen extent -57,-44 57,44, body extent -67,-39 67,39, height 10
FP-CBR04C-MFG [mm]
  rect 0.52x0.52 smd paste+0 mask+0: 1(-0.4,0) 2(0.4,0)
  silkscreen extent -0.53,-0.68 0.53,0.67, body extent -0.8,-0.4 0.8,0.4, height 0.25
FP-CRCW0805-e3-IPC_A [mil]
  rect 47.5x59.38 smd paste+0 mask+0: 1(-41.37,0) 2(41.37,0)
  silkscreen extent -3,-25 3,25, body extent -85,-49 85,49, height 10
FP-CRCW0805-e3-IPC_C [mil]
  rect 31.75x51.5 smd paste+0 mask+0: 1(-33.5,0) 2(33.5,0)
  silkscreen extent -3,-25 3,25, body extent -53,-31 53,31, height 10
FP-CRCW0805-e3-MFG [mm]
  rect 0.95x1.45 smd paste+0 mask+0: 1(-0.975,0) 2(0.975,0)
  silkscreen extent -0.13,-0.7 0.13,0.7, body extent -1.55,-0.82 1.55,0.82, height 0.25
FP-D0014A-MFG [mm]
  rect 1.55x0.6 smd paste-1000 mask+0: 1(-2.7,3.81) 2(-2.7,2.54) 3(-2.7,1.27) 4(-2.7,0) 5(-2.7,-1.27) 6(-2.7,-2.54) 7(-2.7,-3.81) 8(2.7,-3.81) 9(2.7,-2.54) 10(2.7,-1.27) 11(2.7,0) 12(2.7,1.27) 13(2.7,2.54) 14(2.7,3.81)
  silkscreen extent -4.15,-4.38 1.55,4.37, body extent -3.57,-4.62 3.57,4.62, height 0.25
FP-DGS0010A-IPC_C [mm]
  rect 1.257x0.312 smd paste+0 mask+0: 1(-2.051,1)
  rrect100% 1.257x0.312 smd paste+0 mask+0: 2(-2.051,0.5) 3(-2.051,0) 4(-2.051,-0.5) 5(-2.051,-1) 6(2.051,-1) 7(2.051,-0.5) 8(2.051,0) 9(2.051,0.5) 10(2.051,1)
  silkscreen extent -3.38,-1.5 0.92,1.5
FP-ERA6A-IPC_C [mil]
  rect 39.55x49.69 smd paste+0 mask+0: 1(-29.56,0) 2(29.56,0)
  silkscreen extent -49,-42 49,42, body extent -53,-31 53,31, height 10
FP-ERJ6EN-IPC_B [mil]
  rect 45.47x53.63 smd paste+0 mask+0: 1(-34.47,0) 2(34.47,0)
  silkscreen extent -57,-43 57,43
FP-FCE-MFG [mm]
  rect 4x1.6 smd paste+0 mask+0: 1(-3.1,0) 2(3.1,0)
  silkscreen extent -5.77,-4.25 4.25,4.25, body extent -5.35,-4.5 5.35,4.5, height 0.25
FP-FKC-MFG [mm]
  rect 2.8x1.6 smd paste+0 mask+0: 1(-2.15,0) 2(2.15,0)
  silkscreen extent -4.22,-2.75 2.75,2.75, body extent -3.8,-3 3.8,3, height 0.25
FP-FKF-MFG [mm]
  rect 4x2 smd paste+0 mask+0: 1(-3.55,0) 2(3.55,0)
  silkscreen extent -6.27,-4.25 4.25,4.25, body extent -5.8,-4.5 5.8,4.5, height 0.25
FP-FTD-MFG [mm]
  rect 3.2x1.6 smd paste+0 mask+0: 1(-2.5,0) 2(2.5,0)
  silkscreen extent -4.82,-3.4 3.4,3.4, body extent -4.35,-3.65 4.35,3.65, height 0.25
FP-FTF-MFG [mm]
  rect 4x2 smd paste+0 mask+0: 1(-3.55,0) 2(3.55,0)
  silkscreen extent -6.27,-4.25 4.25,4.25, body extent -5.8,-4.5 5.8,4.5, height 0.25
FP-GRM21B-0_1-IPC_C [mil]
  rect 37.71x49.69 smd paste+0 mask+0: 1(-28.63,0) 2(28.63,0)
  silkscreen extent -47,-42 47,42, body extent -51,-31 51,31, height 10
FP-HZ0805-MFG [mm]
  rect 1.285x1.47 smd paste+0 mask+0: 1(-0.973,0) 2(0.973,0)
  silkscreen extent -1.1,-1.15 1.1,1.15, body extent -1.72,-0.83 1.72,0.83, height 0.25
FP-LGA-14L-DM00249496-MFG [mm]
  rect 0.575x0.35 smd paste+0 mask+0: 1(-1.163,0.75) 2(-1.163,0.25) 3(-1.163,-0.25) 4(-1.163,-0.75) 8(1.163,-0.75) 9(1.163,-0.25) 10(1.163,0.25) 11(1.163,0.75)
  rect 0.35x0.575 smd paste+0 mask+0: 5(-0.5,-0.913) 6(0,-0.913) 7(0.5,-0.913) 12(0.5,0.913) 13(0,0.913) 14(-0.5,0.913)
  silkscreen extent -2.5,-1.58 1.82,1.58, body extent -2.05,-1.8 2.05,1.8, height 0.25
FP-LQW18AN_00-MFG [mm]
  rect 0.625x0.85 smd paste+0 mask+0: 1(-0.662,0) 2(0.662,0)
  silkscreen extent -0.9,-0.82 0.9,0.82, body extent -1.07,-0.6 1.07,0.6, height 0.25
FP-PCM12SMTR-MFG [mm]
  rect 0.7x1.5 smd paste+0 mask+0: 1(-2.25,2.5) 2(0.75,2.5) 3(2.25,2.5)
  rect 1x0.8 smd paste+0 mask+0: 4(-3.65,1.715) 5(3.65,1.715) 6(-3.65,-0.215) 7(3.65,-0.215)
  round 0.9 hole 0.9 unplated paste-2539.97 mask+0: ""(-1.5,0.75) ""(1.5,0.75)
  silkscreen extent -3.35,-2.05 3.35,3.95, body extent -4.25,-2.15 4.25,3.35, height 0.25
FP-PTS645SM43SMTR92LFS-MFG [mm]
  rect 1.55x1.3 smd paste+0 mask+0: 1(-3.975,2.25) 2(3.975,2.25) 3(-3.975,-2.25) 4(3.975,-2.25)
  silkscreen extent -5.52,-3 3,3, body extent -4.85,-3.1 4.85,3.1, height 0.25
FP-RN732A-MFG [mm]
  rect 1x1.35 smd paste+0 mask+0: 1(-1,0) 2(1,0)
  silkscreen extent -0.13,-0.7 0.13,0.7, body extent -1.6,-0.8 1.6,0.8, height 0.25
FP-SML-LX0404SIUPGUSB-MFG [mm]
  rect 0.45x0.45 smd paste+0 mask+0: 1(-0.425,0.425) 2(0.425,0.425) 3(0.425,-0.425) 4(-0.425,-0.425)
  silkscreen extent -1.67,-1.05 1.05,1.05, body extent -0.85,-0.85 0.85,0.85, height 0.25
FP-SML-LXT0805IW-TR-MFG [mm]
  rect 0.9x1.1 smd paste+0 mask+0: 1(-0.95,0) 2(0.95,0)
  silkscreen extent -2.1,-1 1.05,1, body extent -1.5,-0.8 1.5,0.8, height 0.25
LQFP-64_M [mm] "Thin QFP, 64-Leads, Body 10x10mm, Pitch 0.5mm, IPC Low Density"
  oval 2.1x0.3 smd: 1(-5.6,3.75) 2(-5.6,3.25) 3(-5.6,2.75) 4(-5.6,2.25) 5(-5.6,1.75) 6(-5.6,1.25) 7(-5.6,0.75) 8(-5.6,0.25) 9(-5.6,-0.25) 10(-5.6,-0.75) 11(-5.6,-1.25) 12(-5.6,-1.75) 13(-5.6,-2.25) 14(-5.6,-2.75) 15(-5.6,-3.25) 16(-5.6,-3.75) 33(5.6,-3.75) 34(5.6,-3.25) 35(5.6,-2.75) 36(5.6,-2.25) 37(5.6,-1.75) 38(5.6,-1.25) 39(5.6,-0.75) 40(5.6,-0.25) 41(5.6,0.25) 42(5.6,0.75) 43(5.6,1.25) 44(5.6,1.75) 45(5.6,2.25) 46(5.6,2.75) 47(5.6,3.25) 48(5.6,3.75)
  oval 0.3x2.1 smd: 17(-3.75,-5.6) 18(-3.25,-5.6) 19(-2.75,-5.6) 20(-2.25,-5.6) 21(-1.75,-5.6) 22(-1.25,-5.6) 23(-0.75,-5.6) 24(-0.25,-5.6) 25(0.25,-5.6) 26(0.75,-5.6) 27(1.25,-5.6) 28(1.75,-5.6) 29(2.25,-5.6) 30(2.75,-5.6) 31(3.25,-5.6) 32(3.75,-5.6) 49(3.75,5.6) 50(3.25,5.6) 51(2.75,5.6) 52(2.25,5.6) 53(1.75,5.6) 54(1.25,5.6) 55(0.75,5.6) 56(0.25,5.6) 57(-0.25,5.6) 58(-0.75,5.6) 59(-1.25,5.6) 60(-1.75,5.6) 61(-2.25,5.6) 62(-2.75,5.6) 63(-3.25,5.6) 64(-3.75,5.6)
  silkscreen extent -5.72,-4.15 4.15,4.57, body extent -5,-5 5,5, height 1.6
LUMX-SML-LXT0805_V [mm] "SMD, 2-Leads, Body 2x1.25mm"
  rect 1.2x1.2 smd: 1(-1.05,0) 2(1.05,0)
  silkscreen extent -0.41,-0.63 0.23,2.25, body extent -1,-0.63 1,0.63, height 0.8
PCBComponent_1 [mil]
  rect 19.7x15 smd: 1(82.61,-5.48)
  rect 35.4x15 smd: 2(0,-5)
  Top Layer region: -17.7,180 178.9,180 178.9,199.7 -17.7,199.7
  Top Layer region: 178.9,76.1 257.6,76.1 257.6,95.8 178.9,95.8
  Top Layer region: 159.2,76.1 178.9,76.1 178.9,180 159.2,180
  Top Layer region: 257.6,76.1 277.3,76.1 277.3,180 257.6,180
  Top Layer region: 257.6,180 363.9,180 363.9,199.7 257.6,199.7
  Top Layer region: 344.2,76.1 363.9,76.1 363.9,180 344.2,180
  Top Layer region: 363.9,76.1 442.6,76.1 442.6,95.8 363.9,95.8
  Top Layer region: 442.6,76.1 462.3,76.1 462.3,180 442.6,180
  Top Layer region: 442.6,180 548.9,180 548.9,199.7 442.6,199.7
  Top Layer region: 529.2,24.8 548.9,24.8 548.9,180 529.2,180
  Top Layer region: 72.8,-12.9 92.5,-12.9 92.5,180 72.8,180
  Top Layer region: -17.7,-12.9 17.7,-12.9 17.7,180 -17.7,180
  Top Layer region: -17.7,170 17.7,170 17.7,190 -17.7,190
  Top Layer region: 72.8,170 92.5,170 92.5,182.9 72.8,182.9
  Top Layer region: 159.2,170 178.9,170 178.9,182.9 159.2,182.9
  Top Layer region: 188.9,76.1 188.9,95.8 176,95.8 176,76.1
  Top Layer region: 267.6,76.1 267.6,95.8 254.7,95.8 254.7,76.1
  Top Layer region: 277.3,190 257.6,190 257.6,177.1 277.3,177.1
  Top Layer region: 363.9,190 344.2,190 344.2,177.1 363.9,177.1
  Top Layer region: 353.9,95.8 353.9,76.1 366.8,76.1 366.8,95.8
  Top Layer region: 432.6,95.8 432.6,76.1 445.5,76.1 445.5,95.8
  Top Layer region: 442.6,170 462.3,170 462.3,182.9 442.6,182.9
  Top Layer region: 529.2,170 548.9,170 548.9,182.9 529.2,182.9
PW0008A_N [mm] "SOP, 8-Leads, Body 4.5x3.1mm, Pitch 0.65mm, IPC Medium Density"
  rrect22% 1.4x0.45 smd: 1(-2.95,0.975) 2(-2.95,0.325) 3(-2.95,-0.325) 4(-2.95,-0.975) 5(2.95,-0.975) 6(2.95,-0.325) 7(2.95,0.325) 8(2.95,0.975)
  silkscreen extent -3.07,-1.55 1.85,1.87, body extent -3.23,-1.5 3.23,1.5, height 1.2
QFP50P1200X1200X160-64N [mm]
  rect 1.475x0.3 smd: 1(-5.738,3.75) 2(-5.738,3.25) 3(-5.738,2.75) 4(-5.738,2.25) 5(-5.738,1.75) 6(-5.738,1.25) 7(-5.738,0.75) 8(-5.738,0.25) 9(-5.738,-0.25) 10(-5.738,-0.75) 11(-5.738,-1.25) 12(-5.738,-1.75) 13(-5.738,-2.25) 14(-5.738,-2.75) 15(-5.738,-3.25) 16(-5.738,-3.75) 33(5.738,-3.75) 34(5.738,-3.25) 35(5.738,-2.75) 36(5.738,-2.25) 37(5.738,-1.75) 38(5.738,-1.25) 39(5.738,-0.75) 40(5.738,-0.25) 41(5.738,0.25) 42(5.738,0.75) 43(5.738,1.25) 44(5.738,1.75) 45(5.738,2.25) 46(5.738,2.75) 47(5.738,3.25) 48(5.738,3.75)
  rect 0.3x1.475 smd: 17(-3.75,-5.738) 18(-3.25,-5.738) 19(-2.75,-5.738) 20(-2.25,-5.738) 21(-1.75,-5.738) 22(-1.25,-5.738) 23(-0.75,-5.738) 24(-0.25,-5.738) 25(0.25,-5.738) 26(0.75,-5.738) 27(1.25,-5.738) 28(1.75,-5.738) 29(2.25,-5.738) 30(2.75,-5.738) 31(3.25,-5.738) 32(3.75,-5.738) 49(3.75,5.738) 50(3.25,5.738) 51(2.75,5.738) 52(2.25,5.738) 53(1.75,5.738) 54(1.25,5.738) 55(0.75,5.738) 56(0.25,5.738) 57(-0.25,5.738) 58(-0.75,5.738) 59(-1.25,5.738) 60(-1.75,5.738) 61(-2.25,5.738) 62(-2.75,5.738) 63(-3.25,5.738) 64(-3.75,5.738)
  silkscreen extent -6.35,-4.65 4.65,4.65, body extent -6,-6 6,6, height 1.6
RESC2013X50X30LL20T20 [mm] "Chip Resistor, 2-Leads, Body 2.00x1.25mm, IPC High Density"
  rect 0.85x1.35 smd: 1(-0.825,0) 2(0.825,0)
  silkscreen extent -0.1,-0.58 0.1,0.58, body extent -1.1,-0.72 1.1,0.72, height 0.5
RESC2013X50X30NL20T20 [mm] "Chip Resistor, 2-Leads, Body 2.00x1.25mm, IPC Medium Density"
  rect 1.05x1.45 smd: 1(-0.925,0) 2(0.925,0)
  silkscreen extent -0.1,-0.62 0.1,0.63, body extent -1.1,-0.72 1.1,0.72, height 0.5
RESC2013X55X40NL15T20 [mm] "Chip Resistor, 2-Leads, Body 2.00x1.25mm, IPC Medium Density"
  rect 1.1x1.4 smd: 1(-0.875,0) 2(0.875,0)
  body extent -1.07,-0.7 1.08,0.7, height 0.55
RESC2013X60X35LL10T20 [mm] "Chip Resistor, 2-Leads, Body 2.1x1.35mm, IPC High Density"
  rect 0.8x1.25 smd: 1(-0.8,0) 2(0.8,0)
  silkscreen extent -0.1,-0.53 0.1,0.53, body extent -1.05,-0.67 1.05,0.68, height 0.6
RESC2013X60X35ML10T20 [mm] "Chip Resistor, 2-Leads, Body 2.1x1.35mm, IPC Low Density"
  rect 1.2x1.45 smd: 1(-1,0) 2(1,0)
  silkscreen extent -0.1,-0.62 0.1,0.62, body extent -1.05,-0.68 1.05,0.67, height 0.6
RESC2013X60X35NL10T20 [mm] "Chip Resistor, 2-Leads, Body 2.1x1.35mm, IPC Medium Density"
  rect 1x1.35 smd: 1(-0.9,0) 2(0.9,0)
  silkscreen extent -0.1,-0.57 0.1,0.58, body extent -1.05,-0.68 1.05,0.67, height 0.6
RESC2013X60X40LL20T25_A [mm] "Chip Resistor, 2-Leads, Body 2.20x1.35mm, IPC High Density"
  rect 1x1.25 smd: 1(-0.75,0) 2(0.75,0)
  body extent -1.1,-0.67 1.1,0.67, height 0.6
RESC2013X60X40ML20T25 [mm] "Chip Resistor, 2-Leads, Body 2.00x1.25mm, IPC Low Density"
  rect 1.4x1.55 smd: 1(-0.95,0) 2(0.95,0)
  body extent -1.1,-0.72 1.1,0.72, height 0.6
RESC2013X70X40ML20T20 [mm] "Chip Resistor, 2-Leads, Body 2.00x1.25mm, IPC Low Density"
  rect 1.35x1.55 smd: 1(-0.975,0) 2(0.975,0)
  body extent -1.1,-0.72 1.1,0.72, height 0.7
SOIC127P790X216-8N [mm]
  rect 1.65x0.65 smd: 1(-3.6,1.905) 2(-3.6,0.635) 3(-3.6,-0.635) 4(-3.6,-1.905) 5(3.6,-1.905) 6(3.6,-0.635) 7(3.6,0.635) 8(3.6,1.905)
  silkscreen extent -4.43,-2.64 2.42,2.64, body extent -3.95,-2.64 3.95,2.64, height 2.16
TRACO-SIP-3_V [mm] "SIP, 3-Leads, Body 11.7x7.6mm, Pitch 2.54mm"
  rect 1.35x1.35 hole 0.85 paste-2539.97: 1(-2.54,0)
  round 1.35 hole 0.85 paste-2539.97: 2(0,0) 3(2.54,0)
  silkscreen extent -5.84,-2.77 5.86,5.6, body extent -5.84,-2 5.86,5.6, height 10.2
TSR1-SINGLE_TRP [mil]
  round 50 / inner round 60 / far side round 50 hole 30 paste-99999 mask+0: 1(0,0) 2(100,0) 3(200,0)
  silkscreen extent -220,-85 335,225
TSR(N [mil]
  rect 67x22 smd paste+0 mask+0: 1(-213,200) 5(-213,-200) 6(213,-200) 7(213,-100) 9(213,100) 10(213,200)
  silkscreen extent -188,-304 266,304, body extent -233,-299 233,299, height 299
WE-MK_0402_L1W0.5H0.5 [mm] "SMD Multilayer Ceramic Inductor, body 1.00x0.50mm"
  rect 0.6x0.6 smd: 1(-0.55,0) 2(0.55,0)
  body extent -0.5,-0.25 0.5,0.25, height 0.5

## Part data
C1 C3: library part CMP-2007-00219-2, "Capacitor; Ceramic; Cap 10 pF; Tol 5%; Vol-Rtg 50 VDC; SMT; 0805; COG (NPO); Tape&Reel", Capacitance="10 pF", Manufacturer=KEMET, Package=C0805C-DN, Temperature="-55°C to +125°C", Temperature Characteristic=C0G, Temperature Coefficient=30ppm/°C, Temperature Range High=+125°C, Temperature Range Low=-55°C, Tolerance=0.05, Voltage Rating="50 V", Automotive=No, Category=Cap, ComponentLink2Description=Datasheet, ComponentLink2URL=https://content.kemet.com/datasheets/KEM_C1003_C0G_SMD.pdf, Device Class L1="Passive Components", Device Class L2=Capacitors, Device Class L3="Ceramic Capacitors", Digikey Description="Capacitor; Ceramic; Cap 10 pF; Tol 5%; Vol-Rtg 50 VDC; SMT; 0805; COG (NPO); Tape&Reel", Height=0.88mm, Ipc Land Pattern Name=CAPC200125X78, Lead Free=Yes, Manufacturer Part Number=C0805C100J5GACTU, Material=Ceramic, Mouser Description="KEMET - C0805C100J5GACTU - CAP, MLCC, C0G/NP0, 10PF, 50V, 0805", Octopart=https://octopart.com/c0805c100j5gactu-kemet-104357, RoHS=TRUE
C2: library part CMP-2007-04174-2, "General Purpose Ceramic Capacitor, 0805, 100nF, 10%, X7R, 15%, 100V", Capacitance=100nF, Case Code (Imperial)=0805, Case Code (Metric)=2012, Dielectric=X7R, Dielectric Material=Ceramic, Max Operating Temperature=125°C, Min Operating Temperature=-55°C, Package Quantity=2000, Tolerance=10%, Voltage=100V, Case/Package=0805, Construction=Flat, Contact Plating=Tin, Depth=1.25mm, Height=1.4mm, Lead Free="Lead Free", Length=2.01mm, Mount="Surface Mount", Number of Pins=2, Packaging="Tape and Reel", Radiation Hardening=No, REACH SVHC="No SVHC", RoHS Compliant=Yes, Series=-, Termination=SMD/SMT, Thickness=0.055inch, Voltage Rating=100V, Voltage Rating (DC)=100V, Width=0.049inch
C4: library part CMP-2007-03453-2, "Chip Multilayer Ceramic Capacitors for General Purpose, 0805, 10uF, X5R, 15%, 10%, 16V", Capacitance=10uF, Case Code (Imperial)=0805, Case Code (Metric)=2012, Dielectric=X5R, Max Operating Temperature=85°C, Min Operating Temperature=-55°C, Package Quantity=1, Tolerance=10%, Voltage=16V, Case/Package=0805, Depth=1.25mm, Height=1.25mm, Lead Free="Lead Free", Length=2mm, Material=Ceramic, Mount="Surface Mount", Packaging="Tape and Reel", Radiation Hardening=No, REACH SVHC="No SVHC", Termination=SMD/SMT, Thickness=0.053inch, Voltage Rating=16V, Voltage Rating (DC)=16V, Width=1.25mm
C5 C6: library part CMP-2007-03236-1, Manufacturer=Kemet, Part Number=C0805C105K5RACTU
C7: library part CMP-2007-03243-2, "CAP CER 10UF 10V X5R 0805", 3DS Part Number=220-00001, Capacitance=10uF, Manufacturer=Kemet, Package=C0805C-DG, Temperature="-55°C to +85°C", Temperature Characteristic=X5R, Temperature Coefficient=15%, Temperature Range High=+85°C, Temperature Range Low=-55°C, Tolerance=10%, Voltage=10V, Automotive=No, Category=Cap, ComponentLink2Description=Datasheet, ComponentLink2URL=https://content.kemet.com/datasheets/KEM_C1006_X5R_SMD.pdf, Device Class L1="Passive Components", Device Class L2=Capacitors, Device Class L3="Ceramic Capacitors", Digikey Description="CAP CER 10UF 10V X5R 0805", Height=1.4mm, Ipc Land Pattern Name=CAPC200125X125, Lead Free=Yes, Manufacturer Part Number=C0805C106K8PACTU, Material=Ceramic, Mouser Description="CAP CER 10UF 10V X5R 0805", Octopart=https://octopart.com/c0805c106k8pactu-kemet-98697, RoHS=TRUE, Voltage Rating=10V
C8: library part CMP-03020-032188-1, "CAP CER 0.1UF 10V 5% X7R 0805", Capacitance="0.10 μF", Manufacturer=KEMET, Package=C0805C-DN, Temperature="-55°C to +125°C", Temperature Characteristic=X7R, Temperature Coefficient=30ppm/°C, Temperature Range High=+125°C, Temperature Range Low=-55°C, Tolerance=0.05, Voltage Rating="10 V", Automotive=No, Category=Cap, ComponentLink2Description=Datasheet, ComponentLink2URL=https://content.kemet.com/datasheets/KEM_C1003_C0G_SMD.pdf, Device Class L1="Passive Components", Device Class L2=Capacitors, Device Class L3="Ceramic Capacitors", Digikey Description="CAP CER 0.1UF 10V 5% X7R 0805", Height=0.88mm, Ipc Land Pattern Name=CAPC200125X78, Lead Free=Yes, Manufacturer Part Number=C0805C104J8RACTU, Material=Ceramic, Mouser Description="Multilayer Ceramic Capacitors MLCC - SMD/SMT 10volts 0.1uF X7R 5%", Octopart=https://octopart.com/c0805c104j8ractu-kemet-11807087, RoHS=TRUE
C9: library part CMP-2006-03332-2, "CAP CER 8.2PF 50V NP0 0603", Capacitance="8.2 pF", Manufacturer=KEMET, Package=C0603C-CF, Temperature="-55°C to +125°C", Temperature Characteristic=C0G, Temperature Coefficient=30ppm/°C, Temperature Range High=+125°C, Temperature Range Low=-55°C, Tolerance="0.25 pF", Voltage Rating="50 V", Automotive=Yes, Automotive Grade="Grade 1", Category=Cap, ComponentLink2Description=Datasheet, ComponentLink2URL=https://api.kemet.com/component-edge/download/datasheet/C0603C100J5GACAUTO.pdf, Device Class L1="Passive Components", Device Class L2=Capacitors, Device Class L3="Ceramic Capacitors", Digikey Description="CAP CER 8.2PF 50V NP0 0603", Height=0.87mm, Lead Free=Yes, Manufacturer Part Number=C0603C829C5GACTU, Material=Ceramic, Mouser Description="Multilayer Ceramic Capacitors MLCC - SMD/SMT 50volts 8.2pF C0G 0.25%", Octopart=https://octopart.com/c0603c829c5gactu-kemet-8375751, RoHS=TRUE
C10: library part CMP-03020-011124-1, "CBR0402 2.4 pF 30ppm/°C 0.1 pF C0G 50 V", Capacitance="2.4 pF", Manufacturer=KEMET, Package=CBR04C, Temperature="-55°C to +125°C", Temperature Characteristic=C0G, Temperature Coefficient=30ppm/°C, Temperature Range High=+125°C, Temperature Range Low=-55°C, Tolerance="0.1 pF", Voltage Rating="50 V", Automotive=No, Category=Cap, ComponentLink2Description=Datasheet, ComponentLink2URL=https://content.kemet.com/datasheets/KEM_C1030_CBR_SMD.pdf, Device Class L1="Passive Components", Device Class L2=Capacitors, Device Class L3="Ceramic Capacitors", Height=0.55mm, Ipc Land Pattern Name=CAPC10050X50, Lead Free=Yes, Manufacturer Part Number=CBR04C249B5GAC, Material=Ceramic, Octopart=https://octopart.com/cbr04c249b5gac-kemet-75200062, RoHS=TRUE
C11 C15 C29: library part CMP-05427-000060-1, "CAP ALUM 47UF 20% 50V SMD", Capacitance=47uF, Case/Package=Radial, Dielectric Material=Aluminium, ESR (Equivalent Series Resistance)=680mR, Leakage Current=23.5uA, Max Operating Temperature=105°C, Min Operating Temperature=-55°C, Package Quantity=1, Ripple Current=195mA, Tolerance=20%, Voltage=50V, Construction=Cylindrical, Contact Plating=Tin, Diameter=6.3mm, Height=5.8mm, Height - Seated (Max)=0.24inch, Lead Diameter=0.65mm, Lead Free="Lead Free", Lead Pitch=1.8mm, Length=5.8mm, Life (Hours)=2000Hour, Mount="Surface Mount", Number of Pins=2, Packaging="Tape and Reel", Radiation Hardening=No, REACH SVHC="No SVHC", Ripple Current (AC)=195mA, RoHS Compliant=Yes, Series=FT, Termination=SMD/SMT, Voltage Rating=50V, Voltage Rating (DC)=50V
C12: library part CMP-05427-000092-1, "CAP ALUM 220UF 20% 50V SMD", Capacitance=220uF, Case/Package=Radial, Dielectric Material=Aluminium, ESR (Equivalent Series Resistance)=180mR, Leakage Current=110uA, Max Operating Temperature=105°C, Min Operating Temperature=-55°C, Package Quantity=500, Ripple Current=670mA, Tolerance=20%, Voltage=50V, Construction=Cylindrical, Contact Plating=Tin, Diameter=8mm, Height=10.2mm, Height - Seated (Max)=0.413inch, Lead Diameter=0.9mm, Lead Free="Lead Free", Lead Pitch=3.1mm, Length=10.2mm, Life (Hours)=2000Hour, Mount="Surface Mount", Number of Pins=2, Packaging="Tape and Reel", Radiation Hardening=No, REACH SVHC="No SVHC", Ripple Current (AC)=670mA, RoHS Compliant=Yes, Series=FT, Termination=SMD/SMT, Voltage Rating=50V, Voltage Rating (DC)=50V
C13 C14 C16 C17 C20 C21 C22 C23 C24 C27 C31 C32 C33 C35 C37 C38 C39 C40 C41 C42 C43 C44 C45 C46 C49 C50 C52 C53 C54 C55: library part CMP-001-00018-6, "Chip Capacitor, 100 nF, +/- 10%, 50 V, 0805 (2012 Metric)", Capacitor Type=Ceramic, Case/Package=0805, Max Operating Temperature=125°C, Min Operating Temperature=-55°C, Tolerance=10%, Voltage Rating=50V, Mounting Technology=SM, Pins=2, RoHS Compliant=True
C18 C19: library part CMP-2000-05810-2, "General Purpose Ceramic Capacitor, 0805, 2.2uF, 10%, X5R, 15%, 10V", Capacitance=2.2uF, Case Code (Imperial)=0805, Case Code (Metric)=2012, Dielectric=X5R, Dielectric Material=Ceramic, Insulation Resistance=500MR, Max Operating Temperature=85°C, Min Operating Temperature=-55°C, Package Quantity=1, Tolerance=10%, Voltage=10V, Case/Package=0805, Construction=Flat, Contact Plating=Tin, Depth=1.25mm, Dissipation Factor=5%, Height=1.4mm, Lead Free="Lead Free", Length=2.01mm, Mount="Surface Mount", Number of Pins=2, Packaging="Tape and Reel", Radiation Hardening=No, REACH SVHC="No SVHC", RoHS Compliant=Yes, Series=-, Size=1.4mm, Termination=SMD/SMT, Thickness=0.055inch, Voltage Rating=10V, Voltage Rating (DC)=10V, Width=0.049inch
C25 C26: library part CMP-2007-04621-1, Manufacturer="AVX Interconnect / Elco", Part Number=08055A150JAT2A
C28: library part CMP-2000-06208-3, "CAP ALUM 100UF 20% 50V SMD", Capacitance=100uF, Case/Package=Radial, Dielectric Material=Aluminium, ESR (Equivalent Series Resistance)=340mR, Leakage Current=3uA, Max Operating Temperature=105°C, Min Operating Temperature=-55°C, Package Quantity=1, Ripple Current=350mA, Tolerance=20%, Voltage=50V, Construction=Cylindrical, Contact Plating=Tin, Diameter=8mm, Height=10.2mm, Height - Seated (Max)=0.402inch, Impedance=340mR, Lead Free="Lead Free", Length=10.2mm, Life (Hours)=2000Hour, Material=Aluminium, Mount="Surface Mount", Number of Pins=2, Packaging="Tape and Reel", Radiation Hardening=No, REACH SVHC="No SVHC", Ripple Current (AC)=350mA, RoHS Compliant=Yes, Series=FK, Termination=SMD/SMT, Voltage Rating=50V, Voltage Rating (DC)=50V, Width=10mm
C30: library part CMP-05427-000030-1, "CAP ALUM 10UF 20% 50V SMD", Capacitance=10uF, Case/Package=Radial, Dielectric Material=Aluminium, ESR (Equivalent Series Resistance)=1.52R, Leakage Current=3uA, Max Operating Temperature=105°C, Min Operating Temperature=-55°C, Package Quantity=1000, Ripple Current=85mA, Tolerance=20%, Voltage=50V, Construction=Cylindrical, Contact Plating=Tin, Diameter=5mm, Height=5.8mm, Height - Seated (Max)=0.228inch, Impedance=1.52R, Lead Free="Lead Free", Length=5.8mm, Life (Hours)=2000Hour, Material=Aluminium, Mount="Surface Mount", Number of Pins=2, Packaging="Tape and Reel", Radiation Hardening=No, REACH SVHC="No SVHC", Ripple Current (AC)=85mA, RoHS Compliant=Yes, Series=FK, Termination=SMD/SMT, Voltage Rating=50V, Voltage Rating (DC)=50V, Width=6.5mm
C34: library part CMP-05427-002128-1, "CAP ALUM 22UF 20% 50V SMD", Capacitance=22uF, Case/Package=Radial, Dielectric Material=Aluminium, ESR (Equivalent Series Resistance)=700mR, Leakage Current=3uA, Max Operating Temperature=105°C, Min Operating Temperature=-40°C, Package Quantity=1000, Ripple Current=120mA, Tolerance=20%, Voltage=50V, Construction=Cylindrical, Contact Plating=Tin, Diameter=8mm, Height=6.2mm, Height - Seated (Max)=0.244inch, Impedance=700mR, Lead Free="Lead Free", Lead Length=3.4mm, Lead Pitch=2.2mm, Length=6.5mm, Life (Hours)=1000Hour, Material=Aluminium, Mount="Surface Mount", Number of Pins=2, Packaging="Tape and Reel", Polarity=Polar, Radiation Hardening=No, Reach SVHC Compliant=Yes, Ripple Current (AC)=120mA, RoHS Compliant=Yes, Series=FC, Termination=SMD/SMT, Voltage Rating=50V, Voltage Rating (DC)=50V, Width=8.3mm
C36 C47 C48: library part CMP-08246-000007-2, "Multilayer Ceramic Capacitors 4.7μF ±10% 50V X5R SMD 0805", Capacitance=4.7uF, Case Code (Imperial)=0805, Case Code (Metric)=2012, Dielectric=X5R, Dielectric Material=Ceramic, Max Operating Temperature=85°C, Min Operating Temperature=-55°C, Package Quantity=1, Tolerance=10%, Voltage=50V, Case/Package=0805, Construction=Flat, Depth=1.25mm, Height=1.25mm, Lead Free="Lead Free", Length=2mm, Mount="Surface Mount", Packaging="Tape and Reel", Radiation Hardening=No, REACH SVHC="No SVHC", Resistor Type=Ceramic, Series=C, Termination=SMD/SMT, Thickness=0.057inch, Voltage Rating=50V, Voltage Rating (DC)=50V, Weight=0.000194oz, Width=0.049inch
C56 C57: library part CMP-2007-00597-2, "CAP CER 27PF 50V C0G/NP0 0805", Capacitance="27 pF", Manufacturer=KEMET, Package=C0805C-DN, Temperature="-55°C to +125°C", Temperature Characteristic=C0G, Temperature Coefficient=30ppm/°C, Temperature Range High=+125°C, Temperature Range Low=-55°C, Tolerance=0.05, Voltage Rating="50 V", Automotive=No, Category=Cap, ComponentLink2Description=Datasheet, ComponentLink2URL=https://content.kemet.com/datasheets/KEM_C1003_C0G_SMD.pdf, Device Class L1="Passive Components", Device Class L2=Capacitors, Device Class L3="Ceramic Capacitors", Digikey Description="CAP CER 27PF 50V C0G/NP0 0805", Height=0.88mm, Ipc Land Pattern Name=CAPC200125X78, Lead Free=Yes, Manufacturer Part Number=C0805C270J5GACTU, Material=Ceramic, Mouser Description="Cap Ceramic 27pF 50V C0G 5% SMD 0805 125C Plastic T/R", Octopart=https://octopart.com/c0805c270j5gactu-kemet-91046, RoHS=TRUE
D1: library part CMP-2000-07119-2, "LED RGB CLEAR SMD", Case Code (Imperial)=0404, Case Code (Metric)=1010, Color=Blue, Forward Current=2mA, Forward Voltage=2.73V, Lens Color=Colorless, Max Operating Temperature=85°C, Min Operating Temperature=-40°C, Package Quantity=2000, Power Rating=30mW, Case/Package=0404, Height=0.3mm, Lead Free="Lead Free", Length=1mm, Lens Style=Square, Lens Transparency=Clear, Luminous Intensity=20mcd, Mount="Surface Mount", Number of LEDs=3, Packaging="Tape and Reel", REACH SVHC="No SVHC", Test Current=2mA, Viewing Angle=120°, Wavelength=465nm, Width=1mm